# Altium PCB HYDRA_V3_TEMPLATE_MCU_UNDER.PcbDoc
Units mm, origin at the board's own origin, x right, y up, seen from the top; angles counter-clockwise.
Board outline 50 x 45 mm, 4 copper layers (Top Layer, PWR, GND, Bottom Layer), stack 0.603 mm thick; 68 components, 45 nets, 330 pads, 83 vias.
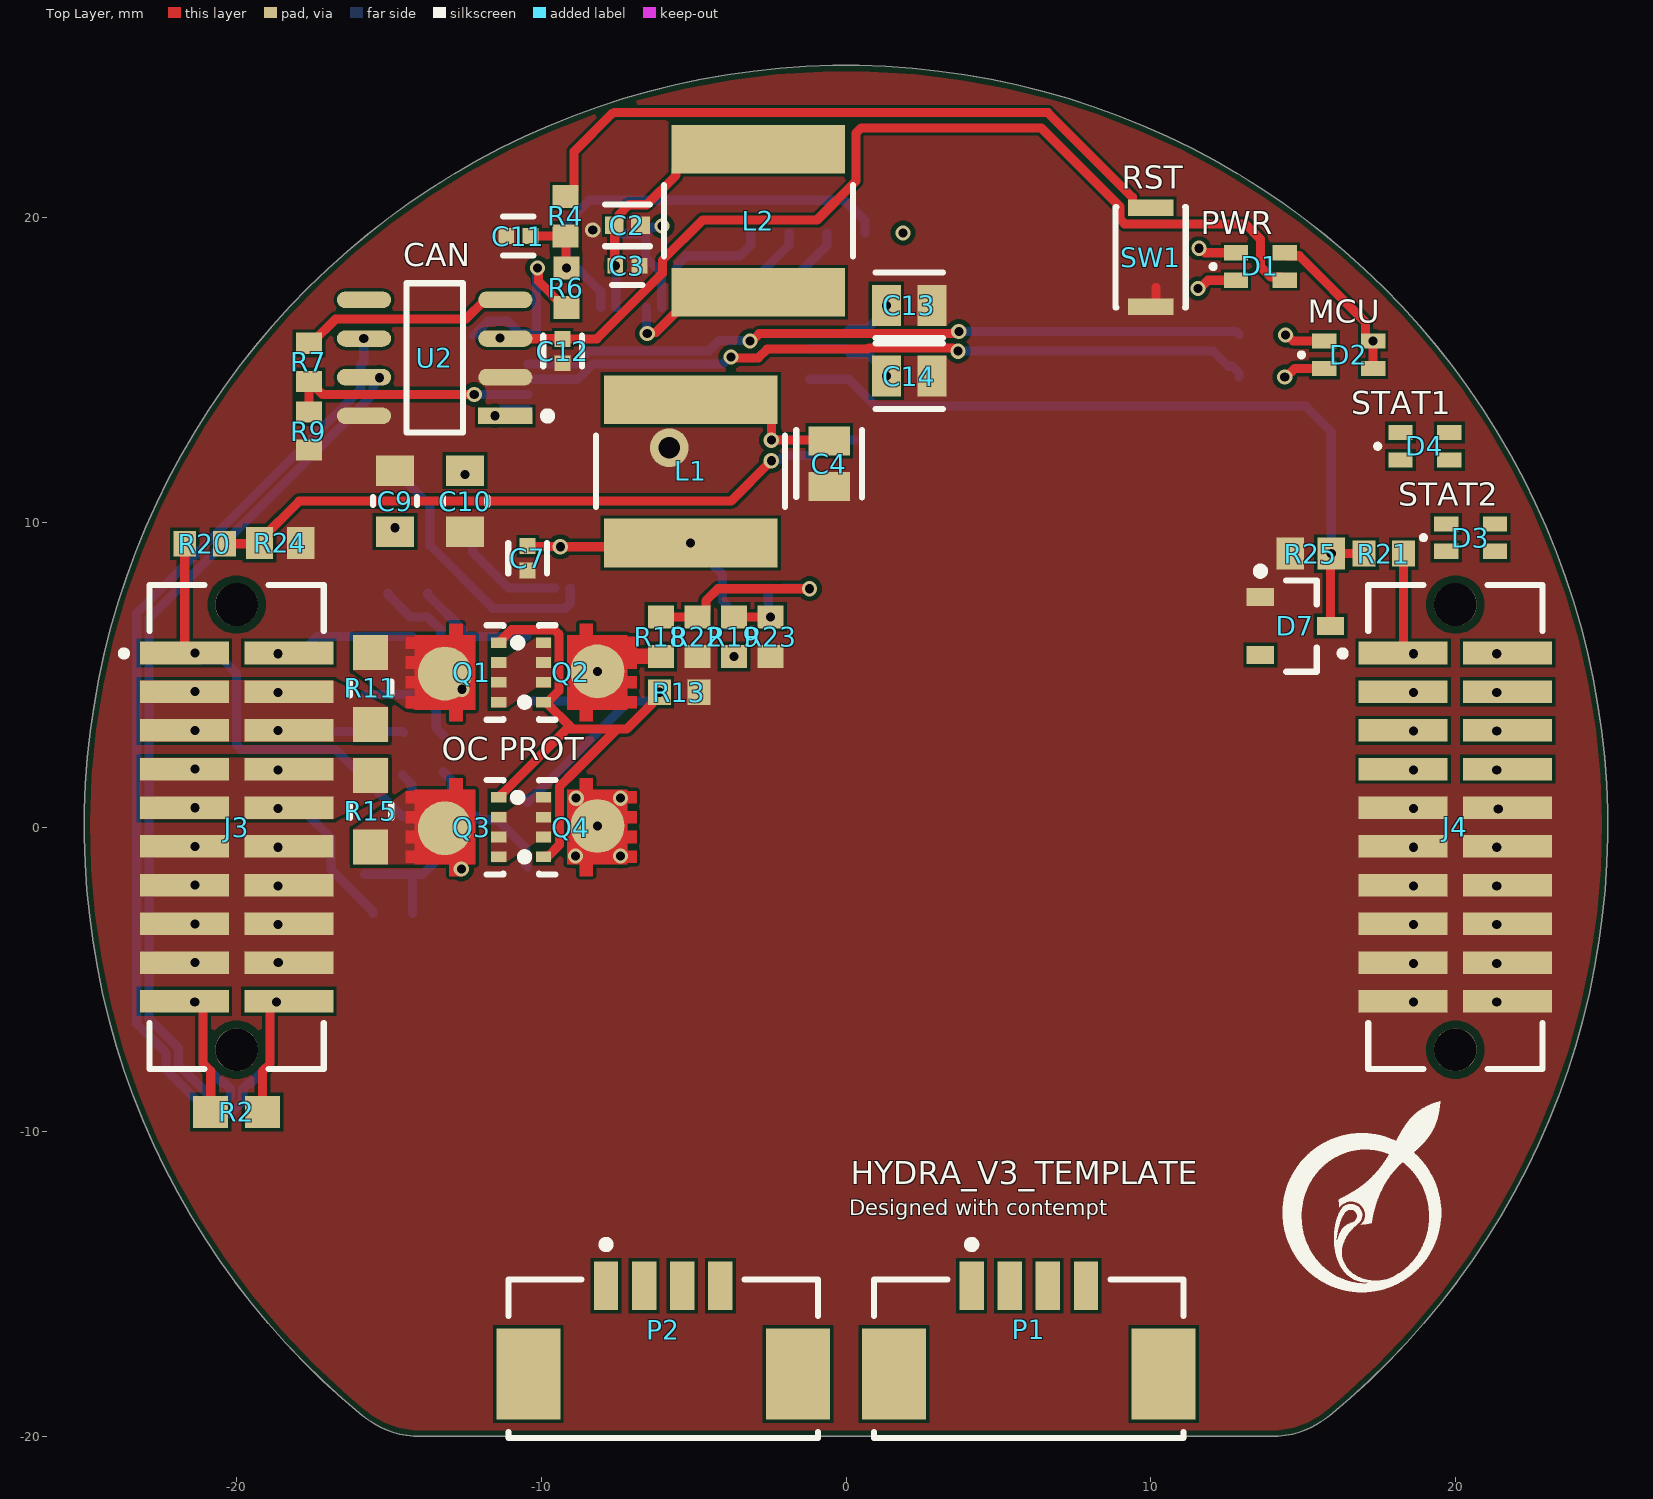
[diagram p0: Top Layer view]
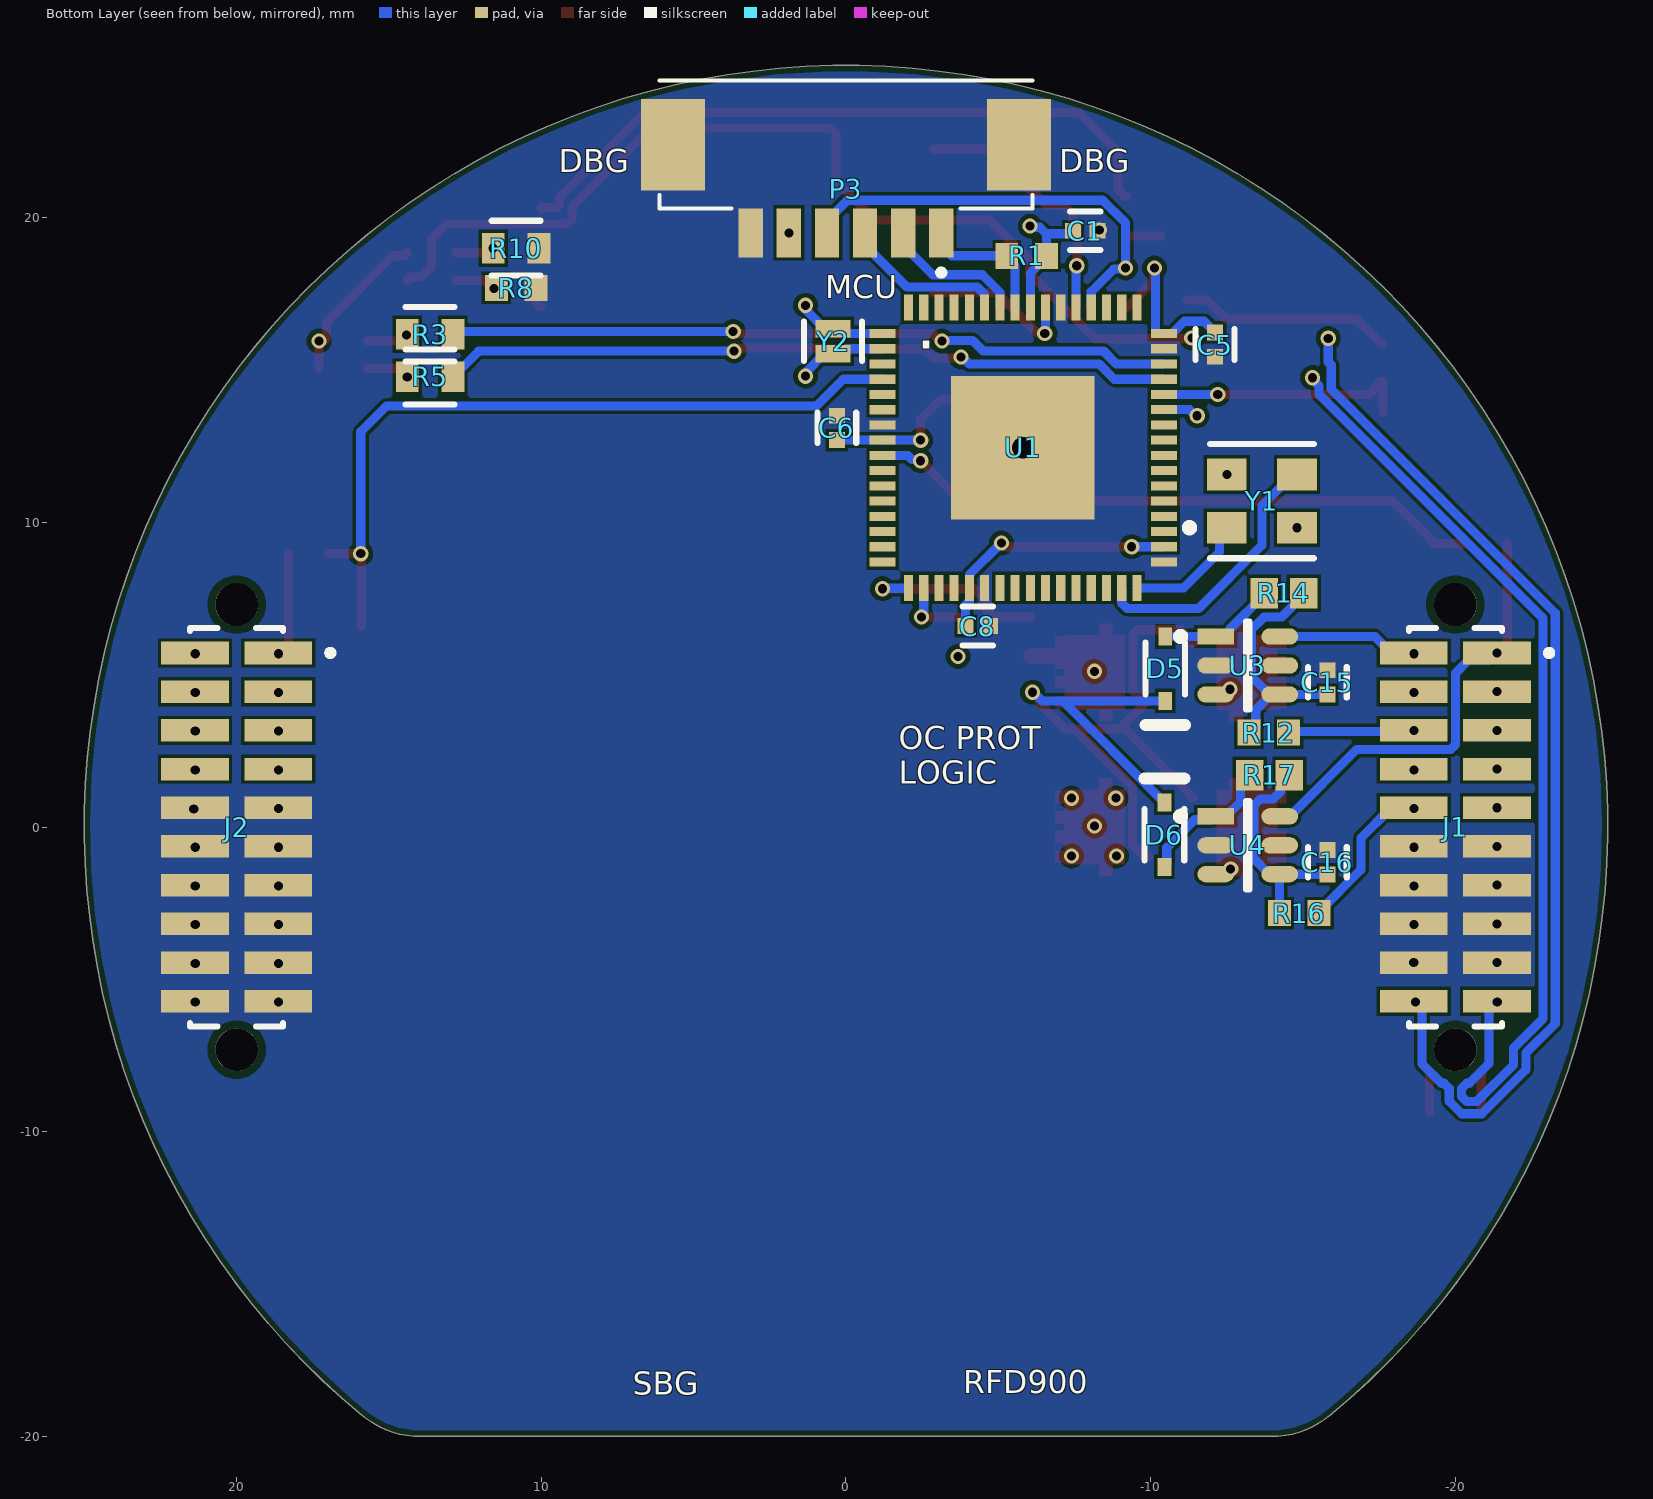
[diagram p1: Bottom Layer view, seen from below]
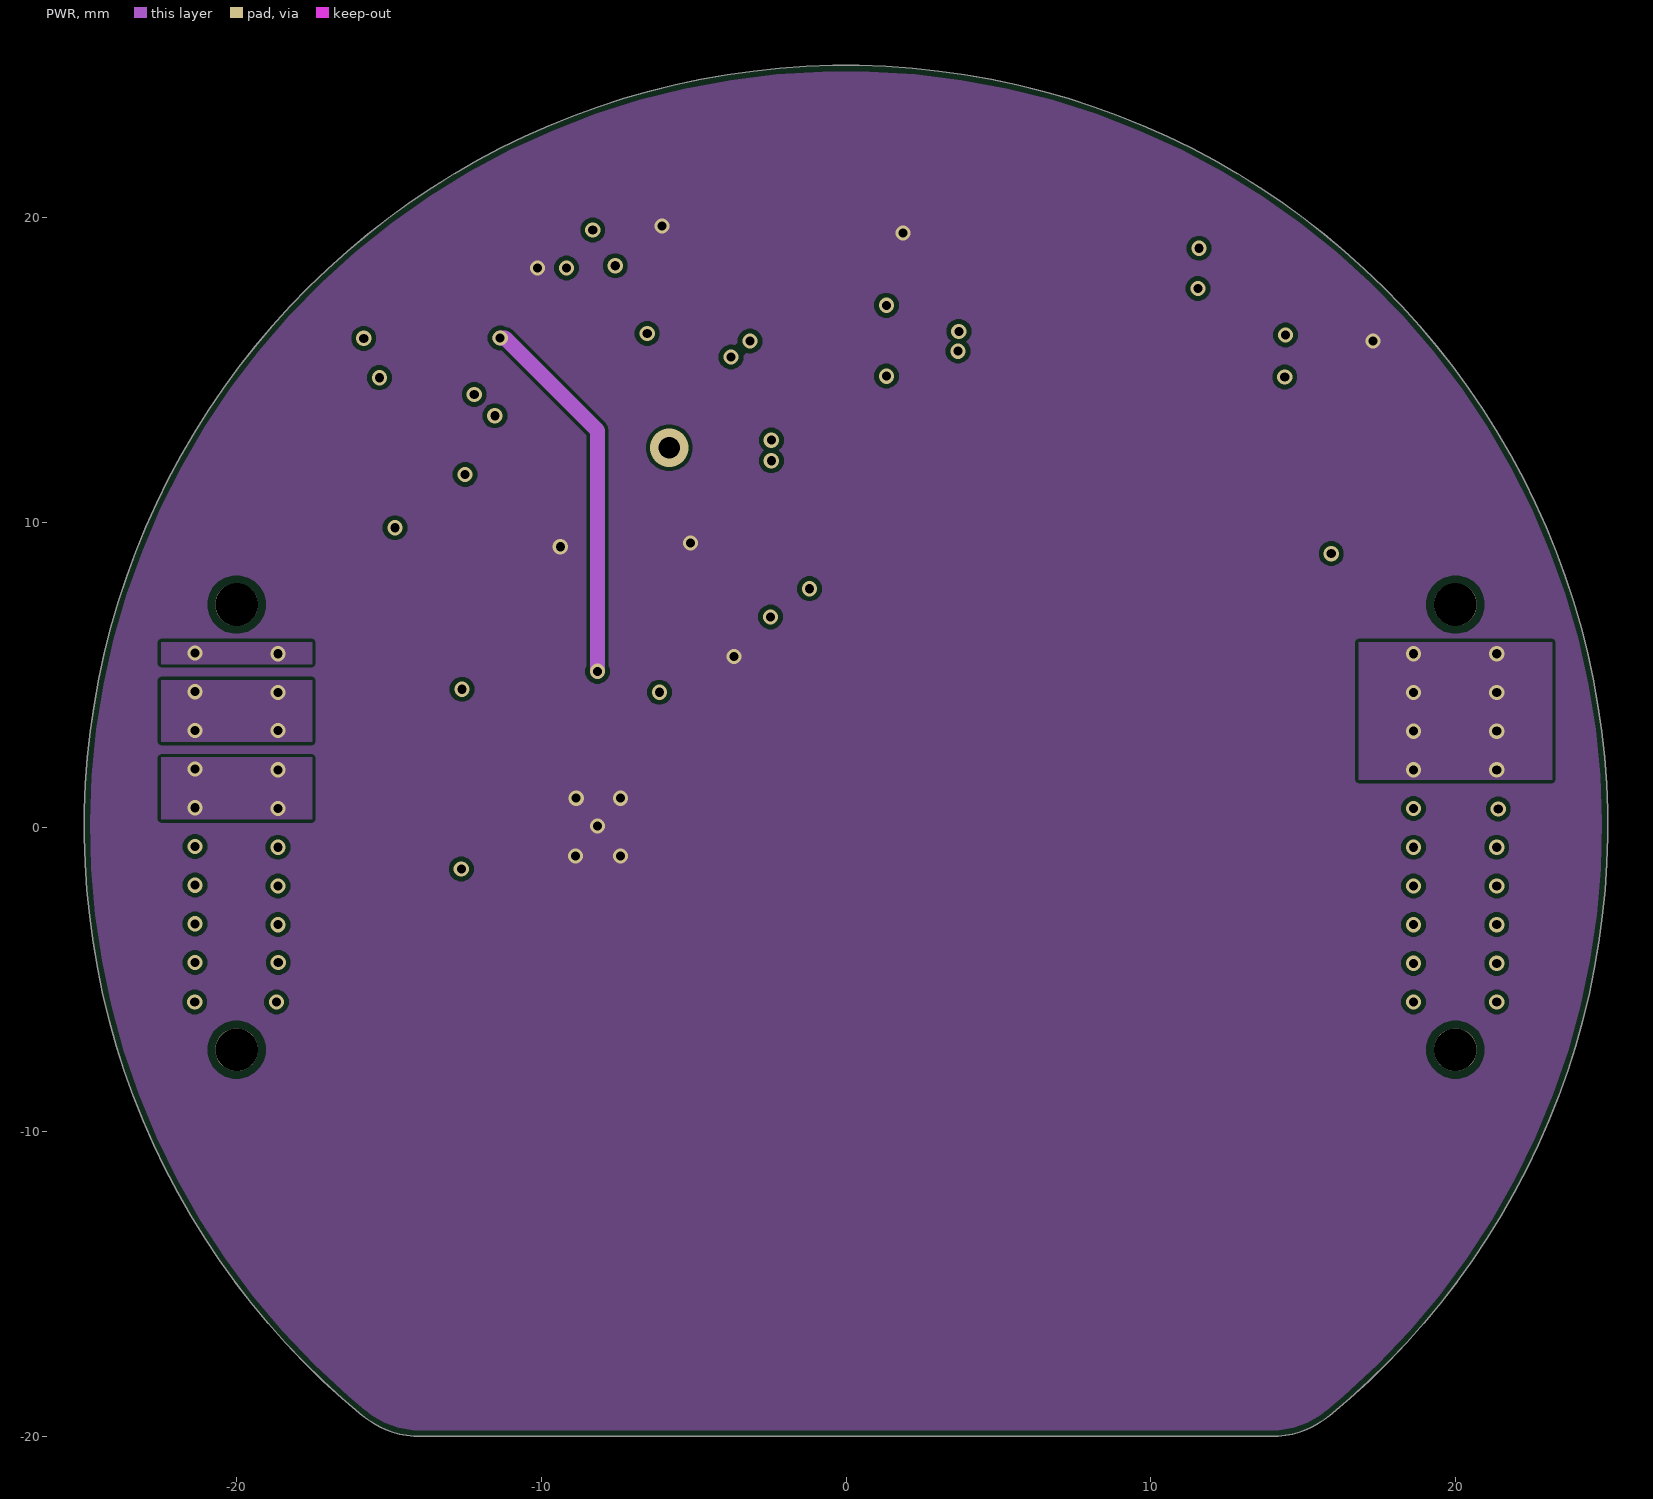
[diagram p2: PWR]
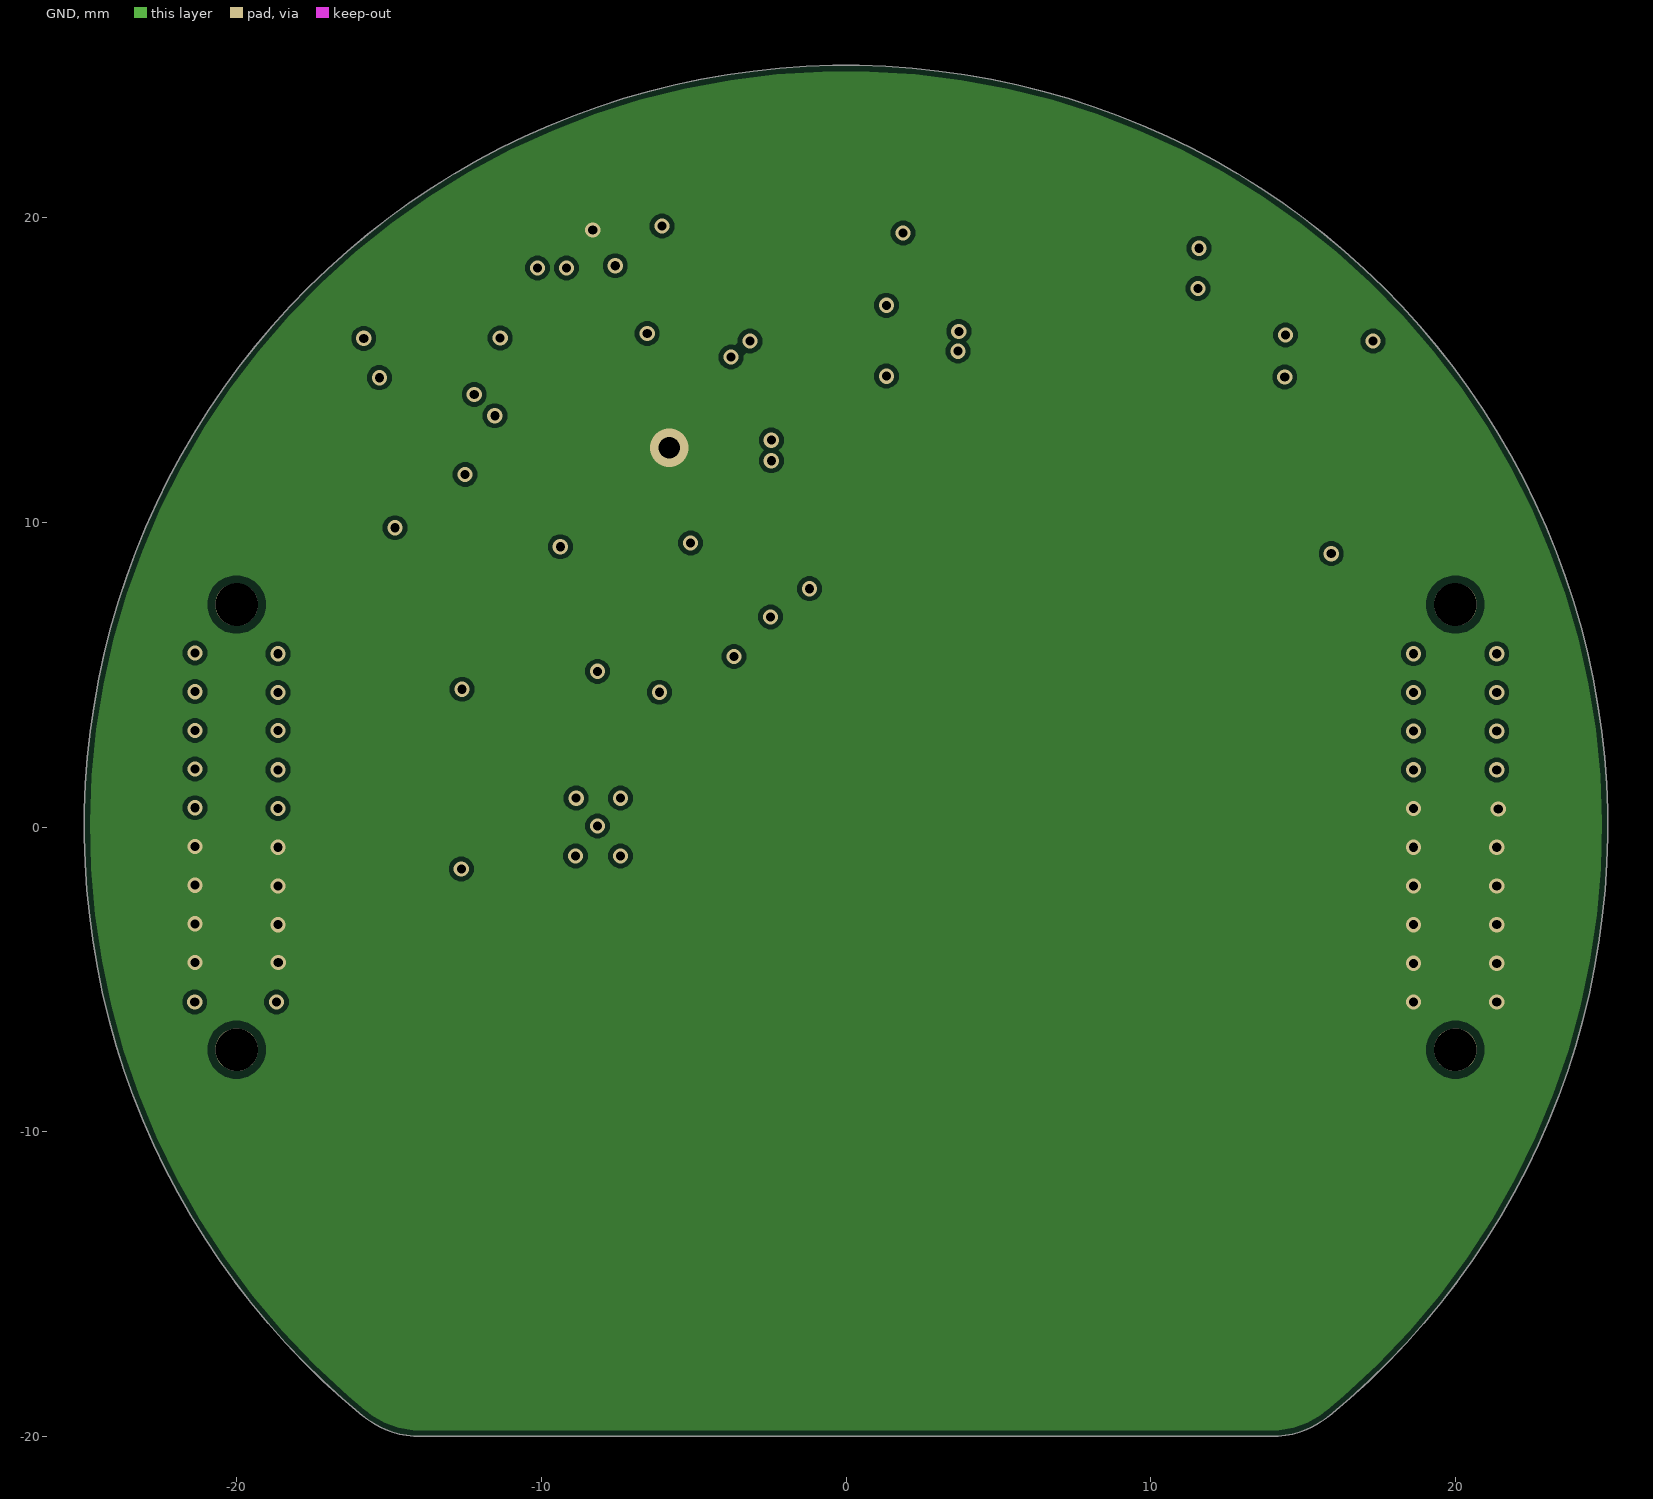
[diagram p3: GND]
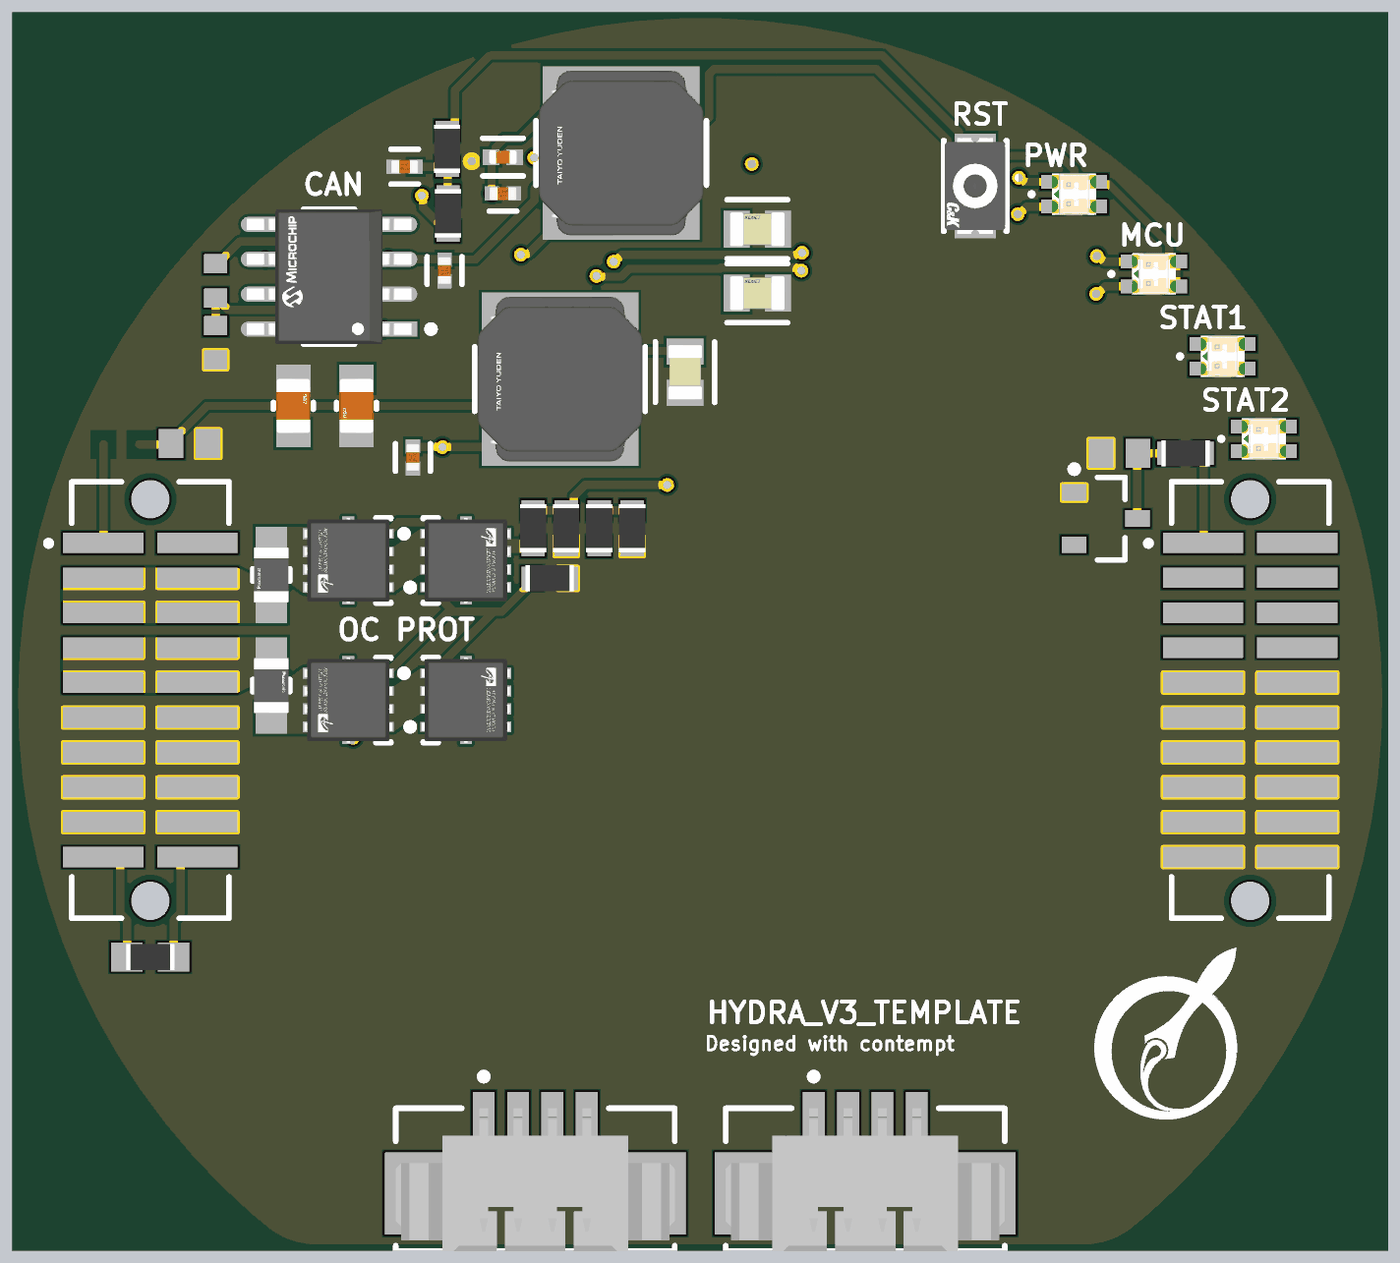
[diagram p4: 3D render of the assembled board from above, using the file's embedded part models]
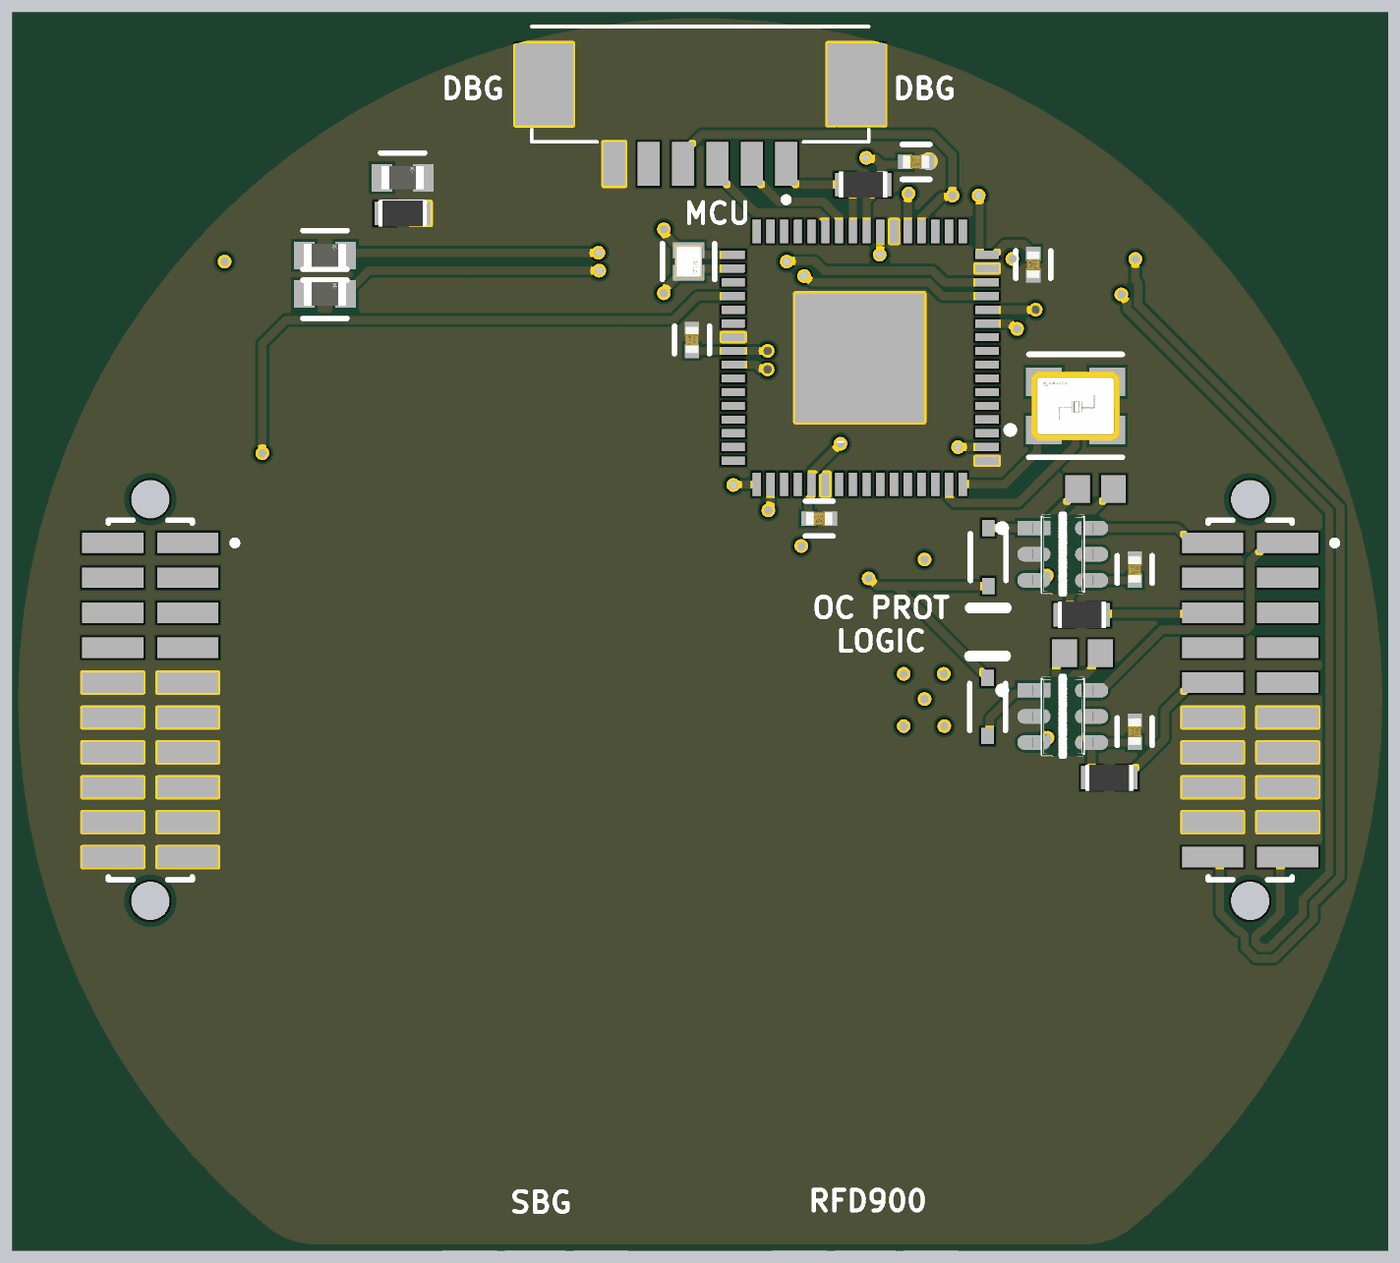
[diagram p5: 3D render of the assembled board from below, using the file's embedded part models]

## Layer stack, top to bottom
Top Solder: solder mask 0.0102, Solder Resist, Dk 3.5
Top Layer: signal copper 0.0356
Dielectric 2: prepreg 0.0711, PP-006, Dk 4.1
PWR: signal copper 0.035
Dielectric 1: dielectric 0.32, FR-4, Dk 4.8
GND: signal copper 0.035
Dielectric 3: prepreg 0.0711, PP-006, Dk 4.1
Bottom Layer: signal copper 0.0356
Bottom Solder: solder mask 0.0102, Solder Resist, Dk 3.5

## Board outline
-15.888,-19.298 ccw(c-13.96,-17) -13.96,-20 13.96,-20 ccw(c13.96,-17) 15.888,-19.298 15.868,-19.318 ccw(c0,0)

## Design rules (kind name [scope] priority, off if disabled: settings)
BoardOutlineClearance [All] p1: gap=0.2 ignorepadtopadclearanceinfootprint=FALSE
Clearance [All] p1: gap=0.102 ignorepadtopadclearanceinfootprint=FALSE except(0.127: Arc-Via Track-Via SMDPad-Via THPad-Via Via-Via Via-Fill Via-Poly Via-Region Via-Text; 0.25: Arc-Hole Track-Hole SMDPad-Hole THPad-Hole Via-Hole Fill-Hole Poly-Hole Region-Hole Text-Hole)
ComponentClearance [All] p1: gap=0.102 collisioncheckmode=3 verticalgap=0.102 showdistances=TRUE
DiffPairsRouting [All] p1: maxlimit=0.102 minlimit=0.102 mostfreqgap=0.102 toplayer_minwidth=0.102 toplayer_maxwidth=1816.048 toplayer_prefwidth=0.102 midlayer1_minwidth=0.102 midlayer1_maxwidth=1816.048 midlayer1_prefwidth=0.102 midlayer2_minwidth=0.102 midlayer2_maxwidth=1816.048 midlayer2_prefwidth=0.102 bottomlayer_minwidth=0.102 bottomlayer_maxwidth=1816.048 bottomlayer_prefwidth=0.102 maxuncoupledlength=12.7
Height [All] p1: minheight=0 maxheight=1816.048 prefheight=12.7
HoleSize [All] p1: absolutevalues=TRUE maxlimit=6.3 minlimit=0.2 maxpercent=80.000 minpercent=20.000
HoleToHoleClearance [All] p1: gap=0.25 allowstackedmicrovias=FALSE
MinimumAnnularRing [All] p1: minimumring=0.076
MinimumSolderMaskSliver [All] p1: minsoldermaskwidth=0
PlaneClearance [All] p1: clearance=0.102
PlaneConnect PlaneConnectPowerPads [InPadClass('PowerPads')] p1: planeconnectstyle=Direct reliefexpansion=0.508 reliefentries=4 reliefconductorwidth=0.254 reliefairgap=0.254
PlaneConnect [All] p2: pad.planeconnectstyle=Relief pad.reliefexpansion=0.3 pad.reliefentries=4 pad.reliefconductorwidth=0.102 pad.reliefairgap=0.102 via.planeconnectstyle=Direct via.reliefexpansion=0.3 via.reliefentries=4 via.reliefconductorwidth=0.127 via.reliefairgap=0.127
PolygonConnect PolygonConnectPowerPads [All vs (InPadClass('PowerPads'))] p1: connectstyle=Direct reliefconductorwidth=0.254 reliefentries=4 polygonreliefangle="90 Angle" airgapwidth=0.254
PolygonConnect [All] p2: thpad.connectstyle=Relief thpad.reliefconductorwidth=0.102 thpad.reliefentries=4 thpad.polygonreliefangle="90 Angle" thpad.airgapwidth=0.102 smdpad.connectstyle=Direct smdpad.reliefconductorwidth=0.102 smdpad.reliefentries=4 smdpad.polygonreliefangle="90 Angle" smdpad.airgapwidth=0.102 via.connectstyle=Direct via.reliefconductorwidth=0.127 via.reliefentries=4 via.polygonreliefangle="90 Angle" via.airgapwidth=0.127
RoutingVias [All] p1: holewidth=0.2 width=0.45 viastyle="Through Hole" minholewidth=0.2 minwidth=0.45 maxholewidth=6.3 maxwidth=6.55
SilkToSilkClearance [All] p1: silktosilkclearance=0
SilkToSolderMaskClearance [IsPad] p1: minsilkscreentomaskgap=0.102 clearancetoexposedcopper=TRUE
SolderMaskExpansion [All] p1: expansion=0.075 istentingtop=FALSE
Width [All] p1: maxlimit=1816.048 minlimit=0.102 preferedwidth=0.102
20 further rules are at their usual default settings.

## Classes and differential pairs
component class OC_PROT: C15 C16 D5 D6 Q1 Q2 Q3 Q4 R11 R12 R13 R14 R15 R16 R17 U3 U4
component class MCU_PINOUT: C1 C2 C3 C4 C5 C6 C7 C8 C9 C10 C11 C12 C13 C14 D1 D2 D7 L1 L2 P3 R1 R2 R3 R4 R5 R6 R7 R8 R9 R10 R18 R19 R20 R21 R22 R23 R24 R25 SW1 U1 U2 Y1 Y2
component class HYDRA_V3_TEMPLATE: D3 D4 J1 J2 J3 J4 P1 P2
differential pair CAN0_R: +CAN0_R_P -CAN0_R_N

## Components (designator, comment, footprint, x,y, rotation, side; value= is the part's Value field where it differs from the comment)
C1 "C0402C104K8PACTU" FP-C0402-BB-MFG -7.85,19.575 r180 bottom value="0.10 μF"
C2 "GRM155R60J475ME47D" FP-GRM155-0_1-IPC_B -7.175,19.75 r180 top
C3 "C0402C104K8PACTU" FP-C0402-BB-MFG -7.175,18.425 r0 top value="0.10 μF"
C4 "C0805C106K8PACTU" FP-C0805C-DG-MFG -0.55,11.925 r270 top value=10uF
C5 "C0402C104K8PACTU" FP-C0402-BB-MFG -12.112,15.838 r270 bottom value="0.10 μF"
C6 "C0402C104K8PACTU" FP-C0402-BB-MFG 0.3,13.1 r90 bottom value="0.10 μF"
C7 "C0402C104K8PACTU" FP-C0402-BB-MFG -10.45,8.825 r270 top value="0.10 μF"
C8 "C0402C104K8PACTU" FP-C0402-BB-MFG -4.325,6.6 r180 bottom value="0.10 μF"
C9 "08051A6R8CAT2A" FP-0805-L_2_01_0_2-W_1_25-MFG -14.8,10.7 r90 top
C10 "08051A6R8CAT2A" FP-0805-L_2_01_0_2-W_1_25-MFG -12.5,10.7 r270 top
C11 "C0402C104K8PACTU" FP-C0402-BB-MFG -10.75,19.4 r180 top value="0.10 μF"
C12 "C0402C104K8PACTU" FP-C0402-BB-MFG -9.3,15.625 r90 top value="0.10 μF"
C13 "C0805C180J5GACTU" FP-C0805C-DN-MFG 2.075,17.125 r0 top value="18 pF"
C14 "C0805C180J5GACTU" FP-C0805C-DN-MFG 2.075,14.8 r0 top value="18 pF"
C15 "C0402C104K8PACTU" FP-C0402-BB-MFG -15.8,4.75 r90 bottom value="0.10 μF"
C16 "C0402C104K8PACTU" FP-C0402-BB-MFG -15.8,-1.15 r90 bottom value="0.10 μF"
D1 "150066RG54050" WL-SBCD_0606 13.6,18.4 r90 top locked
D2 "150066RG54050" WL-SBCD_0606 16.5,15.5 r90 top locked
D3 "150066RG54050" WL-SBCD_0606 20.5,9.5 r90 top locked
D4 "150066RG54050" WL-SBCD_0606 19,12.5 r90 top locked
D5 "1N4148WS-7-F" DIOD-SOD323-2-A_V -10.475,5.199 r270 bottom
D6 "1N4148WS-7-F" DIOD-SOD323-2-A_V -10.45,-0.25 r90 bottom
D7 "BZX84-A3V3,215" SOT95P230X110-3N 14.75,6.6 r0 top
J1 "SFML-110-02-L-D-A" SFML-110-02-L-D-A-Footprint-1 -20,0 r270 bottom locked
J2 "SFML-110-02-L-D-A" SFML-110-02-L-D-A-Footprint-1 20,0 r270 bottom locked
J3 "TFML-110-02-L-D-A" TFML-110-02-L-D-A-Footprint-1 -20,0 r270 top locked
J4 "TFML-110-02-L-D-A" TFML-110-02-L-D-A-Footprint-1 20,0 r270 top locked
L1 "NR6028T100M" FP-NR6028-MFG -5.1,11.675 r90 top
L2 "NR6028T100M" FP-NR6028-MFG -2.875,19.9 r90 top
P1 "53261-0471" MOLEX-53261-0471_V 6,-16.5 r0 top
P2 "53261-0471" MOLEX-53261-0471_V -6,-16.5 r0 top
P3 "0532610671" 0532610671-Footprint-1 0,19.5 r0 bottom
Q1 "SISH615ADN-T1-GE3" SISH615ADN-T1-GE3-Footprint-1 -12.8,5.037 r90 top
Q2 "SISH615ADN-T1-GE3" SISH615ADN-T1-GE3-Footprint-1 -8.525,5.112 r270 top
Q3 "SISH615ADN-T1-GE3" SISH615ADN-T1-GE3-Footprint-1 -12.8,-0.038 r90 top
Q4 "SISH615ADN-T1-GE3" SISH615ADN-T1-GE3-Footprint-1 -8.525,0.038 r270 top
R1 "ERJ3EKF1002V" RESC1609X55X30LL15T15 -5.925,18.75 r180 bottom
R2 "ERJ-3EKF1200V" RESC1609X55X30ML15T15 -20,-9.35 r180 top
R3 "CRCW060351R0FKEA" FP-CRCW0603-e3-MFG 13.65,16.175 r180 bottom
R4 "ERJ-3EKF3300V" RESC1608X55X30LL15T15#1 -9.2,20.05 r90 top
R5 "CRCW060351R0FKEA" FP-CRCW0603-e3-MFG 13.65,14.775 r180 bottom
R6 "ERJ3EKF1002V" RESC1609X55X30LL15T15 -9.175,17.7 r90 top
R7 "ERJ-3EKF1001V" RESC1608X55X30LL15T15#2 -17.625,15.25 r90 top
R8 "ERJ-3EKF3300V" RESC1608X55X30LL15T15#1 10.825,17.7 r180 bottom
R9 "ERJ3EKF1801V" RESC1608X55X30LL15T15#2 -17.625,13 r90 top
R10 "CRCW060351R0FKEA" FP-CRCW0603-e3-MFG 10.825,19 r180 bottom
R11 "ERJ-6DSFR10V" FP-ERJ6D-MFG -15.6,4.55 r90 top
R12 "ERJ3EKF1002V" RESC1609X55X30LL15T15 -13.875,3.1 r180 bottom
R13 "ERJ3EKF1002V" RESC1609X55X30LL15T15 -5.475,4.425 r180 top
R14 "RT0603BRD071ML" RESC1608X55X30NL20T20 -14.375,7.675 r180 bottom
R15 "ERJ-6DSFR10V" FP-ERJ6D-MFG -15.6,0.525 r270 top
R16 "ERJ3EKF1002V" RESC1609X55X30LL15T15 -14.875,-2.825 r180 bottom
R17 "RT0603BRD071ML" RESC1608X55X30NL20T20 -13.9,1.7 r180 bottom
R18 "ERJ3EKF1002V" RESC1609X55X30LL15T15 -6.075,6.25 r270 top
R19 "ERJ3EKF1002V" RESC1609X55X30LL15T15 -3.675,6.25 r270 top
R20 "ERJ3EKF1002V" RESC1609X55X30LL15T15 -21.05,9.3 r180 top
R21 "ERJ3EKF1002V" RESC1609X55X30LL15T15 17.65,8.975 r0 top
R22 "ERJ3EKF1002V" RESC1609X55X30LL15T15 -4.875,6.25 r90 top
R23 "ERJ3EKF1002V" RESC1609X55X30LL15T15 -2.475,6.25 r90 top
R24 "CRCW06032K70JNEA" RESC1609X50X30ML10T20 -18.575,9.325 r180 top
R25 "CRCW06032K70JNEA" RESC1609X50X30ML10T20 15.25,8.975 r0 top
SW1 "KXT331LHS" FP-KXT331LHS-MFG 10,18.7 r270 top locked
U1 "SAM_E51_64VQFN" SAM_E51_64VQFN-Footprint-1 -2.05,7.85 r180 bottom
U2 "MCP2544FD-E/SN" FP-C04-057-SN-IPC_C -13.5,15.4 r180 top
U3 "TLV1805DBVR" FP-DBV0006A-IPC_C -13.184,5.304 r180 bottom
U4 "TLV1805DBVR" FP-DBV0006A-IPC_C -13.184,-0.596 r180 bottom
Y1 "ABM8-48.000MHZ-B2-T" FP-ABM8-MFG -13.65,10.7 r180 bottom
Y2 "ECS-.327-12.5-1210-TR" FP-ECX-1210-MFG 0.425,15.95 r270 bottom

## Footprints (in the part's own frame and the unit in brackets; to place one, negate y for a bottom-side part, rotate by r counter-clockwise, add the part's x,y. Pads: shape width x height; smd on the part's side, far side on the other; paste and mask are expansions set on the pad)
0532610671-Footprint-1 [mm]
  rect 0.8x1.6 smd: 1(-3.125,0) 2(-1.875,0) 3(-0.625,0) 4(0.625,0) 5(1.875,0) 6(3.125,0)
  rect 2.1x3 smd: S1(-5.675,-2.9) S2(5.675,-2.9)
  silkscreen extent -6.12,-5 6.12,1.4
DIOD-SOD323-2-A_V [mm] "SOD-323, 2-Leads, Body 1.7x1.3mm"
  rect 0.59x0.45 smd: 1(-1.055,0) 2(1.055,0)
  silkscreen extent -0.85,-0.65 1.85,0.65, body extent -0.85,-0.65 0.85,0.65, height 1.2
FP-0805-L_2_01_0_2-W_1_25-MFG [mm]
  rect 1x1.25 smd paste+0 mask+0: 1(-1,0) 2(1,0)
  silkscreen extent -0.13,-0.72 0.13,0.72, body extent -1.6,-0.82 1.6,0.82, height 0.25
FP-ABM8-MFG [mm]
  rect 1.3x1.05 smd paste+0 mask+0: 1(-1.15,-0.875) 2(1.15,-0.875) 3(1.15,0.875) 4(-1.15,0.875)
  silkscreen extent -2.5,-1.88 1.7,1.88, body extent -1.6,-1.25 1.6,1.25, height 0.8
FP-C04-057-SN-IPC_C [mm]
  rect 1.777x0.542 smd paste+0 mask+0: 1(-2.318,1.905)
  rrect100% 1.777x0.542 smd paste+0 mask+0: 2(-2.318,0.635) 3(-2.318,-0.635) 4(-2.318,-1.905) 5(2.318,-1.905) 6(2.318,-0.635) 7(2.318,0.635) 8(2.318,1.905)
  silkscreen extent -3.83,-2.45 0.93,2.45, body extent -3.31,-2.55 3.31,2.55, height 0.25
FP-C0402-BB-MFG [mm]
  rect 0.52x0.52 smd paste+0 mask+0: 1(-0.4,0) 2(0.4,0)
  silkscreen extent -0.5,-0.64 0.5,0.64, body extent -0.5,-0.25 0.5,0.25, height 0.55
FP-C0805C-DG-MFG [mm]
  rect 0.95x1.35 smd paste+0 mask+0: 1(-0.75,0) 2(0.75,0)
  silkscreen extent -1.11,-1.08 1.1,1.07, body extent -1.4,-0.85 1.4,0.85, height 0.25
FP-C0805C-DN-MFG [mm]
  rect 0.95x1.35 smd paste+0 mask+0: 1(-0.75,0) 2(0.75,0)
  silkscreen extent -1.1,-1.07 1.1,1.07, body extent -1.4,-0.85 1.4,0.85, height 0.25
FP-CRCW0603-e3-MFG [mm]
  rect 0.75x1 smd paste+0 mask+0: 1(-0.75,0) 2(0.75,0)
  silkscreen extent -0.8,-0.9 0.8,0.9, body extent -0.77,-0.43 0.77,0.43, height 0.5
FP-DBV0006A-IPC_C [mm]
  rect 1.205x0.53 smd paste+0 mask+0: 1(-1.05,0.95)
  rrect100% 1.205x0.53 smd paste+0 mask+0: 2(-1.05,0) 3(-1.05,-0.95) 4(1.05,-0.95) 5(1.05,0) 6(1.05,0.95)
  silkscreen extent -2.33,-1.45 0.05,1.45, body extent -1.4,-1.45 1.4,1.45, height 1.45
FP-ECX-1210-MFG [mm]
  rect 0.575x1.14 smd paste+0 mask+0: 1(-0.413,0) 2(0.413,0)
  silkscreen extent -0.65,-0.95 0.65,0.95, body extent -0.6,-0.5 0.6,0.5, height 0.5
FP-ERJ6D-MFG [mm]
  rect 1.15x1.15 smd paste+0 mask+0: 1(-1.175,0) 2(1.175,0)
  silkscreen extent -0.23,-0.67 0.23,0.67, body extent -1.85,-0.77 1.85,0.77, height 0.25
FP-GRM155-0_1-IPC_B [mm]
  rect 0.615x0.572 smd paste+0 mask+0: 1(-0.429,0) 2(0.429,0)
  silkscreen extent -0.74,-0.69 0.74,0.69, body extent -0.89,-0.44 0.89,0.44, height 0.25
FP-KXT331LHS-MFG [mm]
  rect 0.55x1.5 smd paste+0 mask+0: 1(-1.625,0) 2(1.625,0)
  silkscreen extent -1.65,-1.15 1.65,1.15, body extent -2,-1.25 2,1.25, height 0.25
FP-NR6028-MFG [mm]
  rect 1.6x5.7 smd paste+0 mask+0: 1(-2.35,0) 2(2.35,0)
  silkscreen extent -1.17,-3.1 1.17,3.1, body extent -3.25,-3.2 3.25,3.2, height 0.25
MOLEX-53261-0471_V [mm] "SMD, 4-Leads, Body 10.15x5.2mm, Pitch 1.25mm"
  rect 0.8x1.6 smd: 1(-1.875,1.45) 2(-0.625,1.45) 3(0.625,1.45) 4(1.875,1.45)
  rect 2.1x3 smd: MP1(-4.425,-1.45) MP2(4.425,-1.45)
  silkscreen extent -5.08,-3.55 5.08,2.93, body extent -5.08,-3.55 5.07,1.65, height 3.4
RESC1608X55X30LL15T15#1 [mm] "Chip Resistor, 2-Leads, Body 1.75x0.95mm, IPC High Density"
  rect 0.75x0.85 smd: 1(-0.65,0) 2(0.65,0)
  body extent -0.87,-0.48 0.87,0.48, height 0.55
RESC1608X55X30LL15T15#2 [mm] "Chip Resistor, 2-Leads, Body 1.60x0.80mm, IPC High Density"
  rect 0.7x0.85 smd: 1(-0.625,0) 2(0.625,0)
  body extent -0.87,-0.48 0.87,0.48, height 0.55
RESC1608X55X30NL20T20 [mm] "Chip Resistor, 2-Leads, Body 1.60x0.80mm, IPC Medium Density"
  rect 0.9x1 smd: 1(-0.65,0) 2(0.65,0)
  body extent -0.9,-0.5 0.9,0.5, height 0.55
RESC1609X50X30ML10T20 [mm] "Chip Resistor, 2-Leads, Body 1.55x0.85mm, IPC Low Density"
  rect 0.9x1.05 smd: 1(-0.675,0) 2(0.675,0)
  body extent -0.82,-0.48 0.82,0.48, height 0.5
RESC1609X55X30LL15T15 [mm] "Chip Resistor, 2-Leads, Body 1.75x0.95mm, IPC High Density"
  rect 0.75x0.85 smd: 1(-0.65,0) 2(0.65,0)
  body extent -0.87,-0.48 0.87,0.48, height 0.55
RESC1609X55X30ML15T15 [mm] "Chip Resistor, 2-Leads, Body 1.75x0.95mm, IPC Low Density"
  rect 1.15x1.05 smd: 1(-0.85,0) 2(0.85,0)
  body extent -0.87,-0.48 0.87,0.48, height 0.55
SAM_E51_64VQFN-Footprint-1 [mm]
  rect 0.85x0.3 smd: 1(-0.85,8.35) 2(-0.85,7.85) 3(-0.85,7.35) 4(-0.85,6.85) 5(-0.85,6.35) 6(-0.85,5.85) 7(-0.85,5.35) 8(-0.85,4.85) 9(-0.85,4.35) 10(-0.85,3.85) 11(-0.85,3.35) 12(-0.85,2.85) 13(-0.85,2.35) 14(-0.85,1.85) 15(-0.85,1.35) 16(-0.85,0.85) 33(8.382,0.85) 34(8.382,1.35) 35(8.382,1.85) 36(8.382,2.35) 37(8.382,2.85) 38(8.382,3.35) 39(8.382,3.85) 40(8.382,4.35) 41(8.382,4.85) 42(8.382,5.35) 43(8.382,5.85) 44(8.382,6.35) 45(8.382,6.85) 46(8.382,7.35) 47(8.382,7.85) 48(8.382,8.35)
  rect 0.3x0.85 smd: 17(0,0) 18(0.5,0) 19(1,0) 20(1.5,0) 21(2,0) 22(2.5,0) 23(3,0) 24(3.5,0) 25(4,0) 26(4.5,0) 27(5,0) 28(5.5,0) 29(6,0) 30(6.5,0) 31(7,0) 32(7.5,0) 49(7.5,9.2) 50(7,9.2) 51(6.5,9.2) 52(6,9.2) 53(5.5,9.2) 54(5,9.2) 55(4.5,9.2) 56(4,9.2) 57(3.5,9.2) 58(3,9.2) 59(2.5,9.2) 60(2,9.2) 61(1.5,9.2) 62(1,9.2) 63(0.5,9.2) 64(0,9.2)
  rect 4.7x4.7 smd: 65(3.75,4.6)
SFML-110-02-L-D-A-Footprint-1 [mm]
  rect 0.74x2.22 smd: 01(-5.715,1.365) 02(-5.715,-1.365) 03(-4.445,1.365) 04(-4.445,-1.365) 05(-3.175,1.365) 06(-3.175,-1.365) 07(-1.905,1.365) 08(-1.905,-1.365) 09(-0.635,1.365) 10(-0.635,-1.365) 11(0.635,1.365) 12(0.635,-1.365) 13(1.905,1.365) 14(1.905,-1.365) 15(3.175,1.365) 16(3.175,-1.365) 17(4.445,1.365) 18(4.445,-1.365) 19(5.715,1.365) 20(5.715,-1.365)
  round 1.4 hole 1.4 unplated: ""(-7.305,0) ""(7.305,0)
  silkscreen extent -6.54,-1.53 6.54,3.17
SISH615ADN-T1-GE3-Footprint-1 [mm]
  rect 0.35x0.5 smd paste+0 mask+0: 1(-0.937,-1.4) 2(-0.288,-1.4) 3(0.363,-1.4) 4(1.012,-1.4)
  round 1.769 smd paste+0 mask+0: 5-6-7-8(0,0.367)
  Top Layer region: -1.187,-0.63 -1.187,-0.215 -1.568,-0.215 -1.568,0.215 -1.187,0.215 -1.187,1.35 -1.137,1.35 -1.137,1.65 -0.737,1.65 -0.737,1.35 -0.487,1.35 -0.487,1.65 -0.088,1.65 -0.088,1.35 0.163,1.35 0.163,1.65 0.563,1.65 0.563,1.35 0.813,1.35 0.813,1.65 1.212,1.65 1.212,1.35 1.262,1.35 1.262,0.215 1.643,0.215 1.643,-0.215 1.262,-0.215 1.262,-0.63
  silkscreen extent -1.51,-2.38 1.59,-1.01, body extent -1.67,-1.75 1.74,1.75, height 0.25
SOT95P230X110-3N [mm] "SOT23, 3-Leads, Body 2.90x2.30mm, Pitch 0.95mm, IPC Medium Density"
  rect 0.9x0.6 smd: 1(-1.15,0.95) 2(-1.15,-0.95) 3(1.15,0)
  silkscreen extent -1.27,-1.5 0.7,1.92, body extent -0.7,-1.5 0.7,1.5, height 1.1
TFML-110-02-L-D-A-Footprint-1 [mm]
  rect 0.74x2.92 smd: 01(-5.715,-1.715) 02(-5.715,1.715) 03(-4.445,-1.715) 04(-4.445,1.715) 05(-3.175,-1.715) 06(-3.175,1.715) 07(-1.905,-1.715) 08(-1.905,1.715) 09(-0.635,-1.715) 10(-0.635,1.715) 11(0.635,-1.715) 12(0.635,1.715) 13(1.905,-1.715) 14(1.905,1.715) 15(3.175,-1.715) 16(3.175,1.715) 17(4.445,-1.715) 18(4.445,1.715) 19(5.715,-1.715) 20(5.715,1.715)
  round 1.4 hole 1.4 unplated: ""(-7.305,0) ""(7.305,0)
  silkscreen extent -7.94,-3.8 7.94,2.86
WL-SBCD_0606 [mm] "SMT Bi-color Chip LED Diffuesed, body 1.5x1.6mm"
  rect 0.5x0.8 smd: 1(-0.45,0.8) 2(-0.45,-0.8) 3(0.45,-0.8) 4(0.45,0.8)
  silkscreen extent -0.07,1.47 0.07,1.62, body extent -0.75,-0.8 0.75,0.8, height 0.55

## Part data
C1 C3 C5 C6 C7 C8 C11 C12 C15 C16: library part CMP-2008-02046-2, "CAP CER 0.1UF 10V X5R 0402", Capacitance="0.10 μF", Manufacturer=Kemet, Package=C0402-BB, Temperature="-55°C to +125°C", Temperature Characteristic=X5R, Temperature Coefficient=15%, Temperature Range High=+125°C, Temperature Range Low=-55°C, Tolerance=0.1, Voltage Rating="10 V", Automotive=No, Category=Cap, ComponentLink2Description=Datasheet, ComponentLink2URL=https://content.kemet.com/datasheets/KEM_C1002_X7R_SMD.pdf, Device Class L1="Passive Components", Device Class L2=Capacitors, Device Class L3="Ceramic Capacitors", Digikey Description="CAP CER 0.1UF 10V X5R 0402", Height=0.55mm, Ipc Land Pattern Name=CAPC10050X50, Lead Free=Yes, Manufacturer Part Number=C0402C104K8PACTU, Material=Ceramic, Mouser Description="Capacitor 100 nF 10 VDC 0402", Octopart=https://octopart.com/c0402c104k8pactu-kemet-140039, RoHS=TRUE
C2: library part CMP-2008-04549-2, "Chip Multilayer Ceramic Capacitors for General Purpose, 0402, 4.7uF, X5R, 15%, 20%, 6.3V", Capacitance=4.7uF, Case Code (Imperial)=0402, Case Code (Metric)=1005, Dielectric=X5R, Max Operating Temperature=85°C, Min Operating Temperature=-55°C, Package Quantity=10000, Tolerance=20%, Voltage=6.3V, Case/Package=0402, Contact Plating=Tin, Depth=0.5mm, Height=0.5mm, Lead Free="Lead Free", Length=1mm, Mount="Surface Mount", Packaging="Tape and Reel", REACH SVHC="No SVHC", Termination=SMD/SMT, Thickness=0.022inch, Voltage Rating=6.3V, Voltage Rating (DC)=6.3V, Weight=0.000212oz, Width=0.02inch
C4: library part CMP-2007-03243-2, "CAP CER 10UF 10V X5R 0805", 3DS Part Number=220-00001, Capacitance=10uF, Manufacturer=Kemet, Package=C0805C-DG, Temperature="-55°C to +85°C", Temperature Characteristic=X5R, Temperature Coefficient=15%, Temperature Range High=+85°C, Temperature Range Low=-55°C, Tolerance=10%, Voltage=10V, Automotive=No, Category=Cap, ComponentLink2Description=Datasheet, ComponentLink2URL=https://content.kemet.com/datasheets/KEM_C1006_X5R_SMD.pdf, Device Class L1="Passive Components", Device Class L2=Capacitors, Device Class L3="Ceramic Capacitors", Digikey Description="CAP CER 10UF 10V X5R 0805", Height=1.4mm, Ipc Land Pattern Name=CAPC200125X125, Lead Free=Yes, Manufacturer Part Number=C0805C106K8PACTU, Material=Ceramic, Mouser Description="CAP CER 10UF 10V X5R 0805", Octopart=https://octopart.com/c0805c106k8pactu-kemet-98697, RoHS=TRUE, Voltage Rating=10V
C9 C10: library part CMP-1036-00709-3, "General Purpose Ceramic Capacitor, 0805, 6.8pF, 0.25pF, C0G, 30ppm/°C, 100V", Capacitance=6.8pF, Case Code (Imperial)=0805, Case Code (Metric)=2012, Dielectric=C0G, Dielectric Material=Ceramic, Insulation Resistance=100GR, Max Operating Temperature=125°C, Min Operating Temperature=-55°C, Package Quantity=1, Temperature Coefficient=0ppm/°C, Tolerance=5%, Voltage=100V, Case/Package=0805, Construction=Flat, Contact Plating=Tin, Depth=1.25mm, Dissipation Factor=10%, Height=0.71mm, Lead Free="Lead Free", Length=2.01mm, Mount="Surface Mount", Number of Pins=2, Packaging="Tape and Reel", Radiation Hardening=No, REACH SVHC="No SVHC", RoHS Compliant=Yes, Series=-, Termination=SMD/SMT, Thickness=0.037inch, Voltage Rating=100V, Voltage Rating (DC)=100V, Width=0.049inch
C13 C14: library part CMP-2007-00302-2, "CAP CER 18PF 50V C0G/NP0 0805", Capacitance="18 pF", Manufacturer=KEMET, Package=C0805C-DN, Temperature="-55°C to +125°C", Temperature Characteristic=C0G, Temperature Coefficient=30ppm/°C, Temperature Range High=+125°C, Temperature Range Low=-55°C, Tolerance=0.05, Voltage Rating="50 V", Automotive=No, Category=Cap, ComponentLink2Description=Datasheet, ComponentLink2URL=https://content.kemet.com/datasheets/KEM_C1003_C0G_SMD.pdf, Device Class L1="Passive Components", Device Class L2=Capacitors, Device Class L3="Ceramic Capacitors", Digikey Description="CAP CER 18PF 50V C0G/NP0 0805", Height=0.88mm, Ipc Land Pattern Name=CAPC200125X78, Lead Free=Yes, Manufacturer Part Number=C0805C180J5GACTU, Material=Ceramic, Mouser Description="Cap Ceramic 18pF 50V C0G 5% SMD 0805 125C Paper T/R", Octopart=https://octopart.com/c0805c180j5gactu-kemet-144810, RoHS=TRUE
D1 D2 D3 D4: library part CMP-004-00034-2, "Led, Red/Grn, 180Mcd/230Mcd, 624Nm/525Nm Rohs Compliant: Yes"
D5 D6: library part CMP-1667-00004-1, "Fast Switching Diode, 75 V, 0.3 A, -65 to 150 degC, 2-Pin SOD323, RoHS, Tape and Reel", ComponentLink1Description="Manufacturer URL", ComponentLink1URL=http://www.diodes.com/, ComponentLink2Description=Datasheet, ComponentLink2URL=http://www.diodes.com/datasheets/ds30097.pdf, DatasheetVersion="Rev. 25-2, 03/2016", PackageDescription="2-Pin Small Outline Diode, Body 1.7 x 1.3 mm", PackageReference=SOD323-2
D7: library part CMP-004-00035-1, "DIODE ZENER 3.3V 250MW SOT23"
J1 J2: library part CMP-002-00076-2, "Headers & Wire Housings .050 Tiger Eye High-Reliability Locking Socket Strip"
J3 J4: library part CMP-002-00077-1, "Conn Shrouded Header (4 Sides) HDR 20 POS 1.27mm Solder ST Top Entry SMD TIGER EYE™ Tube"
L1 L2: library part CMP-14484-000406-1, "SMD Power Inductors 10uH ±20% 1.9A 84.5mΩ", Case/Package=2424, Current Rating=1.9A, DC Resistance (DCR)=84.5mR, Inductance=10uH, Inductance Tolerance=20%, Max Operating Temperature=120°C, Min Operating Temperature=-25°C, Package Quantity=2000, Resistor Type=Wirewound, Self Resonant Frequency=20MHz, Test Frequency=100kHz, Core Material=Ferrite, Halogen Free="Halogen Free", Height=2.8mm, Height - Seated (Max)=0.11inch, Lead Free="Lead Free", Length=0.236inch, Max DC Current=1.9A, Mount="Surface Mount", Number of Pins=2, Packaging="Tape and Reel", RMS Current (Irms)=1.9A, RoHS Compliant=Yes, Saturation Current=1.9A, Series=NR, Shielding=Shielded, Termination=SMD/SMT, Tolerance=20%, Width=6mm
P1 P2: library part CMP-2000-05238-1, "Male Header, Pitch 1.25 mm, 1 x 4 Position, Height 3.4 mm, -40 to 85 degC, RoHS, Tape and Reel", Current Rating=1A, Manufacturer=Molex, Package Description="1.25mm Pitch PicoBlade(TM) Header, Surface Mount, Right Angle, Lead-Free, 4 Circuits", Voltage Rating=125V, Brand=Molex, Contact Material=PhosphorBronze, Contact Plating=Tin, Datasheet URL=http://www.molex.com/pdm_docs/sd/532610471_sd.pdf, Datasheet Version="Rev. G, 01/2012", Factory Pack Quantity=1000, Housing Material=Thermoplastic, Manufacturer URL=http://www.molex.com/, Mounting Angle=Right, Mounting Style=SMD/SMT, Number of Positions=4, Number of Positions / Contacts=4, Number Of Rows=1, Packaging=Reel, Pitch=1.25mm, Product Category=Headers&WireHousings, Product Type=Headers, RoHS=Details, Series=53261, Termination Style=SMD, Tradename=PicoBlade, Type=Shrouded
P3: library part CMP-002-00079-1, "Conn Shrouded Header (4 Sides) HDR 6 POS 1.25mm Solder RA Side Entry SMD PicoBlade™ T/R"
Q1 Q2 Q3 Q4: library part CMP-013-00036-1, "Trans MOSFET P-CH 20V 22.1A 8-Pin PowerPAK 1212 EP T/R"
R1 R6 R12 R13 R16 R18 R19 R20 R21 R22 R23: library part CMP-1012-00623-3, "Chip Resistor, 10 KOhm, +/- 1%, 0.1 W, -55 to 155 degC, 0603 (1608 Metric), RoHS, Tape and Reel", Case Code (Imperial)=0603, Case Code (Metric)=1608, Manufacturer=Panasonic, Max Operating Temperature=155degC, Max Power Dissipation=100mW, Min Operating Temperature=-55degC, Package Description="2-Pin Surface Mount Device, Body 1.6 x 0.85 mm", Package Quantity=1, Package Reference=603, Resistance=10KOhm, Temperature Coefficient=100ppm\/degreesC, Tolerance=1%, Voltage Rating=75V, Case\/Package=0603, Composition=ThickFilm, Contact Plating=Tin, Datasheet URL=https://industrial.panasonic.com/cdbs/www-data/pdf/RDA0000/AOA0000C304.pdf, Datasheet Version=02/2017, Depth=0.8mm, Height=0.45mm, Lead Free=LeadFree, Length=1.6mm, Manufacturer URL=http://www.panasonic.com/, Military Standard=Not, Mount=SurfaceMount, Mounting Technology=SurfaceMount, Number of Pins=2, Number of Terminations=2, Packaging=TapeandReel, Power Rating=100mW, Radiation Hardening=No, REACH SVHC=NoSVHC, RoHSCompliant=true, Termination=SMD/SMT, Voltage Rating (DC)=75V, Width=0.031inch
R2: library part CMP-2000-00213-2, "Chip Resistor, 120 Ohm, +/- 1%, 0.1 W, -55 to 155 degC, 0603 (1608 Metric), RoHS, Tape and Reel", Case Code (Imperial)=0603, Case Code (Metric)=1608, Manufacturer=Panasonic, Max Operating Temperature=155degC, Max Power Dissipation=100mW, Min Operating Temperature=-55degC, Package Description="2-Pin Surface Mount Device, Body 1.6 x 0.85 mm", Package Quantity=1, Resistance=120Ohm, Temperature Coefficient=100ppm/degreesC, Tolerance=1%, Voltage Rating=75V, Case/Package=0603, Composition=ThickFilm, Contact Plating=Tin, Datasheet URL=https://industrial.panasonic.com/cdbs/www-data/pdf/RDA0000/AOA0000C283.pdf, Datasheet Version=42095.0, Depth=0.8mm, Height=0.022inch, Lead Free=LeadFree, Length=1.6mm, Manufacturer URL=http://www.panasonic.com/, Military Standard=Not, Mount=SurfaceMount, Number of Pins=2, Number of Terminations=2, Package Reference=0603, Package URL=http://www.st.com/st-web-ui/static/active/en/resource/technical/document/datasheet/CD00001320.pdf, Packaging=TapeandReel, Power Rating=100mW, Radiation Hardening=No, REACH SVHC=NoSVHC, RoHSCompliant=true, Termination=SMD/SMT, Voltage Rating (DC)=75V, Width=0.031inch
R3 R5 R10: library part CMP-2000-03446-2, "RES Thick Film, 51Ω, 1%, 0.1W, 100ppm/°C, 0603", Case Code (Imperial)=0603, Case Code (Metric)=1608, Max Operating Temperature=155°C, Max Power Dissipation=100mW, Min Operating Temperature=-55°C, Package Quantity=10, Resistance=51R, Temperature Coefficient=100ppm/°C, Tolerance=1%, Voltage Rating=75V, Case/Package=0603, Composition="Thick Film", Contact Plating=Tin, Depth=0.85mm, Features="Automotive AEC-Q200", Height=0.45mm, Lead Free="Lead Free", Length=1.55mm, Military Standard=Not, Number of Pins=2, Number of Terminations=2, Packaging="Tape and Reel", Power Rating=100mW, Radiation Hardening=No, Termination=SMD/SMT, Voltage Rating (DC)=75V, Weight=7.1E-05oz, Width=0.85mm, Working Voltage=75V
R4 R8: library part CMP-2000-00435-2, "Chip Resistor, 330 Ohm, +/- 1%, 0.1 W, -55 to 155 degC, 0603 (1608 Metric), RoHS, Tape and Reel", Current Rating="500 mA", Max Operating Temperature="85 degC", Min Operating Temperature="-25 degC", Package Quantity=1500, Voltage Rating="10 V", ComponentLink1Description="Manufacturer URL", ComponentLink1URL=http://www.panasonic.com/, ComponentLink2Description=Datasheet, ComponentLink2URL=http://industrial.panasonic.com/cdbs/www-data/pdf/RDA0000/AOA0000C86.pdf, Contact Finish=Gold, Contact Material=Copper, Contact Plating=Gold, DatasheetVersion=Apr-15, Gender=Male, Height="1.45 mm", Lead Pitch="1.1 mm", Length="13.7 mm", Mating Cycles=10000, Mount="Surface Mount", PackageDescription="2-Pin Surface Mount Device, Body 1.6 x 0.85 mm", PackageReference=0603, Packaging="Tape and Reel", Pins=8, REACH SVHC="No SVHC", RoHSCompliant=true, Width="1.45 mm"
R7: library part CMP-2000-00180-1, Manufacturer=Panasonic, Part Number=ERJ-3EKF1001V
R9: library part CMP-2000-00294-1, Manufacturer=Panasonic, Part Number=ERJ3EKF1801V
R11 R15: library part CMP-05422-000098-1, "RES 0.1 OHM 1% 1/2W 0805", Case Code (Imperial)=0805, Case Code (Metric)=2012, Max Operating Temperature=155°C, Max Power Dissipation=500mW, Min Operating Temperature=-55°C, Resistance=100mR, Resistor Type="Thick Film", Temperature Coefficient=150ppm/°C, Tolerance=1%, Case/Package=0805, Features="Automotive AEC-Q200", Height=0.028inch, Length=0.079inch, Number of Terminations=2, Packaging="Cut Tape", Width=0.049inch
R14 R17: library part CMP-2000-00925-1, "NOT PANASONIC, THIS IS A 1M RESISTORhttps://www.yageo.com/upload/media/product/productsearch/datasheet/rchip/PYu-RT_1-to-0.01_RoHS_L_13.pdf", Manufacturer=Panasonic, Part Number=ERA-3AEB163V
R24 R25: library part CMP-2000-03183-1, Manufacturer="Vishay Dale", Part Number=CRCW06032K70JNEA
SW1: library part CMP-10040-000029-1, "SWITCH TACTILE SPST-NO 0.02A 15V", Current Rating=5A, Flammability Rating="UL94 V-0", Insulation Color=Black, Max Operating Temperature=85°C, Min Operating Temperature=-40°C, Operating Force=240gf, Actuator Type=Standard, Connector Type=USB, Contact Plating=Gold, Gender=Receptacle, Illumination Type=Non-Illuminated, Mechanical Life=500000Cycles, Mount="Surface Mount", Number Of Contacts=24, Number of Ports=1, Packaging="Tape and Reel", Switch Function=Off-Mom, Switch Travel=0.13mm, Termination=Solder, Throw Configuration=SPST
U1: library part CMP-016-00010-6, "Rudimentary symbol and footprint for the SAM E51 microcontroller"
U2: library part CMP-06279-000031-1, "IC TRANSCEIVER 1/1 8SOIC", Case/Package=SOIC, Max Operating Temperature=125°C, Min Operating Temperature=-40°C, Data Rate=8Mbps, Mount="Surface Mount", Packaging=Rail/Tube, Receiver Hysteresis=200mV, RoHS Compliant=Yes, Series=-
U3 U4: library part CMP-04896-000098-1, "40V, RAIL-TO-RAIL INPUT, PUSH-PU"
Y1: library part CMP-27762-011708-1, "Crystal 48MHz ±20ppm 18pF SMD-4 3.2mm x 2.5mm", Case/Package=CSMD, ESR (Equivalent Series Resistance)=35R, Frequency=48MHz, Frequency Stability=50ppm, Frequency Tolerance=20ppm, Load Capacitance=18pF, Max Operating Temperature=70°C, Min Operating Temperature=-20°C, Operating Frequency="48 MHz", Package Quantity=1000, Resistor Type=Ceramic, Depth=2.5mm, Height=0.031inch, Lead Free="Lead Free", Length=3.2mm, Mount="Surface Mount", Number of Pins=4, Packaging="Tape and Reel", Radiation Hardening=No, REACH SVHC="No SVHC", RoHS Compliant=Yes, Series=ABM8, Series Resistance=35R, Termination=SMD/SMT, Tolerance=20ppm, Width=0.098inch
Y2: library part CMP-40224-000006-1, "CRYSTAL 32.7680KHZ 12.5PF SMD", Frequency=32.768kHz, Load Capacitance=12.5pF, Manufacturer="ECS International", Package=ECX-1210, Temperature="-40°C to +85°C", Temperature Range High=+85°C, Temperature Range Low=-40°C, Tolerance=20ppm, Automotive=No, Category=Crys, ComponentLink2Description=Datasheet, ComponentLink2URL=https://ecsxtal.com/store/pdf/ECX-1210.pdf, Device Class L1="Passive Components", Device Class L2="Crystals / Oscillators", Device Class L3=Crystals, Digikey Description="CRYSTAL 32.7680KHZ 12.5PF SMD", Esr=90kΩ, Height=0.5mm, Lead Free=Yes, Manufacturer Part Number=ECS-.327-12.5-1210-TR, Octopart=https://octopart.com/ecs-.327-12.5-1210-tr-ecs+international-81221340, RoHS=TRUE, Series=ECX-1210

## Via types
v1: diameter 0.5, hole 0.3, Top Layer to Bottom Layer, 82 vias
v2: diameter 1.27, hole 0.711, Top Layer to Bottom Layer, 1 vias

## Nets (pads, with @x,y where several pads share a name; then routed paths per layer and width w, separated by ;. In a path a pad name is that pad's centre, name@x,y a point inside that pad or via, vN(x,y) a via of type N, cw(c..) or ccw(c..) an arc to the next point about the centre after c; other vN are vias at no path point)
3V3: C1.1 C5.1 C7.1 C8.1 D1.3 D2.2 D2.3 L1.1 P3.5 Q4.5-6-7-8 R1.2 R6.1 R19.2 U1.21 U1.34 U1.48 U1.56 | length 25.5
  Top Layer w0.3: C7.1 -10.438,9.212 -9.387,9.212 v1(-9.375,9.2) -5.225,9.2 v1(-5.1,9.325) ; v1(-10.125,18.35) -10.087,18.312 -10.087,17.912 -9.225,17.05 R6.1 ; D1.3 14.5,18.75 14.875,18.75 17.05,16.575 17.05,16.05 17.15,15.95 v1(17.3,15.95) D2.2
  Bottom Layer w0.3: C5.1@-12.216,16.134 -11.75,16.6 -11.107,16.6 -10.707,16.2 -10.163,16.2 -10.163,18.312 v1(-10.125,18.35) ; U1.34 -10.075,9.2 v1(-9.375,9.2) ; C1.1 -7.35,19.475 -6.575,19.475 ; U1.56 -6.05,18.175 -6.575,18.7 -6.575,19.475 ; v1(-6.039,19.725) -6.077,19.687 -6.363,19.687 -6.575,19.475 ; v1(-5.1,9.325) -5.094,9.325 -4.05,8.281 U1.21 -4.05,7.419 -3.925,7.294 C8.1
  other v1: -8.875,-0.95 -7.4,-0.95 -8.157,0.038 -8.857,0.95 -7.4,0.95 -3.675,5.6 1.875,19.5
3V3_POST_SHUNT: Q3.5-6-7-8 R15.2 U4.3
  other v1: -12.625,-1.375
3V3_PRE_SHUNT: J1.07 J1.08 J1.09 J1.10 J3.07 J3.08 J3.09 J3.10 R15.1 R16.2 | length 5.2
  Bottom Layer w0.3: v1(-18.644,0.609) -17.869,0.609 -16.9,-0.36 -16.9,-1.4 -15.525,-2.775 R16.2
  other v1: -21.365,0.635 -18.644,1.879 -21.365,1.905
3V3_SENSE: R19.1 R23.2 U1.18 | length 2.2
  Top Layer w0.3: R19.1 v1(-2.475,6.9)
  Bottom Layer w0.3: U1.18 -2.55,7.029 -2.475,6.954 v1(-2.475,6.9)
5V: C12.2 D1.2 Q2.5-6-7-8 R18.2 U2.3 | length 47.3
  Top Layer w0.3: v1(-11.35,16.05) -11.335,16.035 U2.3 -11.177,16.03 -9.41,16.03 -9.405,16.025 -8.175,16.025 -6.025,18.175 -6.025,18.6 -4.7,19.925 -0.95,19.925 0.325,21.2 0.325,22.774 0.501,22.95 6.4,22.95 8.998,20.352 8.998,19.946 9.146,19.798 13.102,19.798 13.6,19.3 13.6,18.4 13.95,18.05 14.3,18.05 D1.2 ; R18.2@-6.081,5.606 R18.2
  Top Layer w0.5: v1(-8.157,5.112) -7.97,5.112 -7.476,5.606 R18.2@-6.081,5.606
  PWR w0.5: v1(-11.35,16.05) -11.197,16.05 -8.157,13.01 v1(-8.157,5.112)
5V_POST_SHUNT: Q1.5-6-7-8 R11.2 U3.3
  other v1: -12.6,4.525
5V_PRE_SHUNT: J1.03 J1.04 J1.05 J1.06 J3.03 J3.04 J3.05 J3.06 R11.1 R12.2 | length 4.1
  Bottom Layer w0.3: v1(-18.644,3.175) -18.606,3.137 -14.562,3.137 R12.2
  other v1: -21.365,3.175 -18.644,4.419 -21.365,4.445
5V_SENSE: R18.1 R22.2 U1.17 | length 6.3
  Top Layer w0.3: R18.1 -4.825,6.9 -4.6,7.125 -4.6,7.425 -4.2,7.825 v1(-1.2,7.825)
  Bottom Layer w0.3: U1.17 -2.05,7.838 -1.213,7.838 v1(-1.2,7.825)
CAN0_R_N: J1.20 J3.20 R2.1 U2.6 | length 38.8
  Top Layer w0.3: R2.1 -19.15,-8.011 -18.9,-7.761 -18.9,-5.935 -18.68,-5.715 J3.20
  Bottom Layer w0.3: J1.20 -18.68,-5.715 -18.9,-5.935 -18.9,-7.761 -19.544,-8.405 -19.623,-8.405 -19.799,-8.581 -19.799,-8.996 -20.21,-9.407 -20.871,-9.407 -22.312,-7.965 -22.312,-7.415 -23.277,-6.45 -23.277,7.023 -15.925,14.375 -15.925,15.169 -15.825,15.269 v1(-15.825,16.041)
  other v1: -18.689,-5.741
CAN0_R_P: J1.19 J3.19 R2.2 U2.7 | length 36.3
  Top Layer w0.3: J3.19 -21.32,-5.715 -21.1,-5.935 -21.1,-7.761 -20.85,-8.011 R2.2
  Bottom Layer w0.3: J1.19 -21.32,-5.715 -21.1,-5.935 -21.1,-7.761 -20.456,-8.405 -20.377,-8.405 -20.201,-8.581 -20.201,-8.829 -20.377,-9.005 -20.704,-9.005 -21.91,-7.799 -21.91,-7.249 -22.875,-6.284 -22.875,6.857 -15.524,14.208 -15.524,14.486 -15.314,14.696 v1(-15.314,14.75)
  other v1: -21.374,-5.741
CAN0_RX: R7.1 R9.2 U1.44 | length 8.4
  Top Layer w0.3: R9.2 R7.1 -17.55,14.625 -17.35,14.425 -17.35,14.376 -17.174,14.2 v1(-12.2,14.2)
  Bottom Layer w0.3: v1(-12.2,14.2) U1.44
CAN0_TX: U1.43 U2.1 | length 1.2
  Bottom Layer w0.3: v1(-11.525,13.5) -11.471,13.5 -11.271,13.7 U1.43
CUTOFF_MOSFET: D5.2 D6.2 Q1.4 Q2.4 Q3.4 Q4.4 R13.2 | length 27.2
  Top Layer w0.3: Q3.4 -11.325,0.975 -11.3,1 -11.3,1.081 -9.162,3.218 -8.968,3.218 ; Q1.4 -11.325,6.05 -11.3,6.075 -11.3,6.156 -10.979,6.477 -9.571,6.477 -9.423,6.329 -9.423,4.471 Q2.4@-9.769,4.125 ; Q4.4 -9.9,-0.95 -9.769,-0.95 -9.407,-0.587 -9.407,1.329 -8.879,1.857 -7.517,3.218 ; Q2.4@-9.85,4.1 -8.968,3.218 ; v1(-6.125,4.425) -6.35,4.2 -6.35,4.069 -7.201,3.218 -7.517,3.218 ; -8.968,3.218 -7.517,3.218
  Bottom Layer w0.3: D5.2 -7.111,4.144 ; D6.2 -10.45,0.875 -10.375,0.95 -10.305,0.95 -7.111,4.144 ; -6.46,4.144 -7.111,4.144 ; -6.45,4.134 -6.159,4.425 v1(-6.125,4.425)
G_LED: R3.2 U1.46 | length 23.8
  Top Layer w0.3: v1(-3.15,15.95) -3.096,15.95 -2.847,16.198 3.49,16.198 3.523,16.232 3.665,16.232 v1(3.703,16.27)
  Bottom Layer w0.3: U1.46 -8.875,15.2 -8.45,15.625 -4.5,15.625 -4.15,15.975 -3.175,15.975 v1(-3.15,15.95) ; v1(3.703,16.27) 12.805,16.27 R3.2
GND: C1.2 C2.1 C3.2 C4.2 C5.2 C6.2 C7.2 C8.2 C9.2 C10.2 C11.2 C12.1 C13.2 C14.2 C15.2 C16.2 D7.1 J1.11 J1.12 J1.13 J1.14 J1.15 J1.16 J1.17 J1.18 J2.09 J2.10 J2.11 J2.12 J2.13 J2.14 J2.15 J2.16 J2.17 J2.18 J2.19 J2.20 J3.11 J3.12 J3.13 J3.14 J3.15 J3.16 J3.17 J3.18 J4.09 J4.10 J4.11 J4.12 J4.13 J4.14 J4.15 J4.16 J4.17 J4.18 J4.19 J4.20 P3.6 P3.S1 P3.S2 R8.2 R9.1 R10.2 R13.1 R22.1 R23.1 R24.1 R25.1 SW1.2 U1.7 U1.22 U1.33 U1.47 U1.54 U1.65 U2.2 U2.8 U3.2 U4.2 | length 0.7
  Top Layer w0.3: SW1.2 10.05,17.075 10.175,17.2 10.175,17.7
  other v1: 18.626,-5.741 21.356,-5.741 18.626,-4.471 21.356,-4.471 -21.365,-4.445 -18.635,-4.445 -18.644,-3.201 18.626,-3.201 21.356,-3.201 -21.365,-3.175 -18.644,-1.931 18.626,-1.931 21.356,-1.931 -21.365,-1.905 -18.644,-0.661 18.626,-0.661 21.356,-0.661 -21.365,-0.635 21.405,0.596 18.626,0.609 -8.311,19.6
  other v2: -5.8,12.45
NetC2_2: C2.2 C3.1 L2.2 U1.53 | length 8.7
  Top Layer w0.3: C2.2 -7.582,19.75 -7.446,19.886 -7.446,20.104 -7.124,20.426 -6.549,20.426 -5.575,21.399 -5.575,21.6 -4.925,22.25 L2.2 ; C2.2@-7.589,19.736 -7.589,18.439 v1(-7.575,18.425)
  Bottom Layer w0.3: v1(-7.575,18.425) -7.55,18.4 U1.53
NetC9_1: C9.1 Y1.2
  other v1: -14.8,9.825
NetC10_1: C10.1 Y1.4
  other v1: -12.5,11.575
NetC15_1: C15.1 R12.1 R14.2 U3.4 | length 8.2
  Bottom Layer w0.3: C15.1 -15.798,4.352 -14.237,4.352 U3.4 U3.4@-13.959,4.354 ; R14.2 -15.025,7.625 -14.297,6.897 -13.722,6.897 -13.3,6.475 -13.3,4.951 -13.897,4.354 U3.4@-13.959,4.354 ; R12.1@-13.225,3.025 -13.45,3.25 -13.45,3.845 U3.4@-13.959,4.354
NetC16_1: C16.1 R16.1 R17.2 U4.4 | length 7.4
  Bottom Layer w0.3: C16.1 -15.798,-1.548 U4.4@-14.237,-1.548 ; R17.2 -14.25,1.4 -14.25,1.151 -14.024,0.925 -13.6,0.925 -13.381,0.706 -13.381,-1.029 -13.897,-1.546 U4.4 ; U4.4@-14.23,-1.555 -14.23,-2.82 R16.1
NetD1_1: D1.1 R8.1 | length 1.4
  Top Layer w0.3: v1(11.55,17.675) 11.604,17.675 11.879,17.95 D1.1
NetD1_4: D1.4 R10.1 | length 1.3
  Top Layer w0.3: v1(11.588,18.998) 11.642,18.998 11.79,18.85 D1.4
NetD2_1: D2.1 R5.1 | length 1.4
  Top Layer w0.3: v1(14.4,14.775) 14.454,14.775 14.729,15.05 D2.1
NetD2_4: D2.4 R3.1 | length 1.4
  Top Layer w0.3: v1(14.425,16.15) 14.479,16.15 14.679,15.95 D2.4
NetD5_1: D5.1 R14.1 U3.1 | length 3.9
  Bottom Layer w0.3: R14.1 -13.725,7.625 -12.586,6.486 -12.586,6.369 -12.472,6.254 U3.1 D5.1
NetD6_1: D6.1 R17.1 U4.1 | length 4.8
  Bottom Layer w0.3: R17.1@-13.225,1.825 -12.95,1.55 -12.95,0.833 -12.472,0.354 U4.1 -12.019,0.239 -11.439,0.239 -10.525,-0.675 -10.525,-1.23 D6.1
NetL2_1: L2.1 U1.55 | length 5.1
  Top Layer w0.3: v1(-6.525,16.2) -6.487,16.238 -6.237,16.238 -4.925,17.55 L2.1
  Bottom Layer w0.3: U1.55 -6.55,16.225 v1(-6.525,16.2)
NetQ1_1: Q1.1 Q1.2 Q1.3 Q2.1 Q2.2 Q2.3
NetQ3_1: Q3.1 Q3.2 Q3.3 Q4.1 Q4.2 Q4.3
NetR4_2: R4.2 SW1.1 | length 22.5
  Top Layer w0.3: R4.2 -9.15,20.7 -8.925,20.925 -8.925,22.175 -7.674,23.426 -7.599,23.45 6.625,23.45 9.4,20.675 9.4,20.45 9.525,20.325 SW1.1
NetR7_2: R7.2 U2.4 | length 7
  Top Layer w0.3: R7.2 -17.55,15.875 -16.75,16.675 -12.475,16.675 -11.845,17.305 U2.4
PYRO_PWR: J2.01 J2.02 J2.03 J2.04 J2.05 J2.06 J2.07 J2.08 J4.01 J4.02 J4.03 J4.04 J4.05 J4.06 J4.07 J4.08 R21.2 | length 3.3
  Top Layer w0.3: J4.01 18.3,5.73 R21.2
  other v1: 18.626,1.879 21.356,1.879 18.626,3.149 21.356,3.149 18.626,4.419 21.356,4.419 18.626,5.689 21.356,5.689
PYRO_PWR_SENSE: D7.3 R21.1 R25.2 U1.4 | length 25.3
  Top Layer w0.3: D7.3 15.9,8.95 v1(15.925,8.975) R21.1
  Bottom Layer w0.3: U1.4 0.089,14.7 0.964,13.825 15.075,13.825 15.925,12.975 v1(15.925,8.975)
R_LED: R5.2 U1.45 | length 24.2
  Top Layer w0.3: v1(-3.775,15.425) -3.75,15.4 -2.875,15.4 -2.587,15.688 0.708,15.688 0.746,15.727 3.515,15.727 3.621,15.62 v1(3.675,15.62)
  Bottom Layer w0.3: U1.45 -8.807,14.7 -8.307,15.2 -4.051,15.2 -3.826,15.425 v1(-3.775,15.425) ; v1(3.675,15.62) 12.055,15.62 12.55,15.125 12.675,15.125 12.9,14.9 R5.2
RESETN: C11.1 P3.4 R4.1 R6.2 U1.52 | length 16.4
  Top Layer w0.3: C11.1 R4.1 -9.188,19.387 -9.188,18.362 v1(-9.175,18.35)
  Bottom Layer w0.3: U1.52 -8.05,17.575 -8.787,18.312 -9.137,18.312 v1(-9.175,18.35) -9.175,19.825 -8.426,20.574 -0.049,20.574 0.625,19.9 P3.4
SWCLK: P3.1 R1.1 U1.57 | length 4.5
  Bottom Layer w0.3: U1.57 -5.55,18.425 -5.275,18.7 R1.1 -3.475,18.75 -3.125,19.1 P3.1
SWDIO: P3.2 U1.58 | length 4.7
  Bottom Layer w0.3: U1.58 -5.05,17.549 -4.471,18.128 -2.847,18.128 -1.875,19.1 P3.2
SWO: P3.3 U1.59 | length 5.4
  Bottom Layer w0.3: U1.59 -4.55,17.481 -4.304,17.727 -1.998,17.727 -0.625,19.1 P3.3
VCC: J1.01 J1.02 J3.01 J3.02 R20.2 U3.6 U4.6 | length 19
  Top Layer w0.3: J3.01 -21.7,5.73 R20.2
  Bottom Layer w0.3: v1(-21.365,5.715) -21.145,5.495 -20.405,5.495 -20.405,5.455 -20.003,5.053 -20.003,2.708 -19.846,2.55 -16.768,2.55 -14.573,0.354 U4.6 ; J1.02 -17.895,5.715 -17.356,6.254 U3.6
  other v1: -18.644,5.689
VCC_SENSE: R20.1 R24.2 U1.9 | length 20.4
  Top Layer w0.3: R20.1 -19.275,9.3 R24.2 -19.25,9.4 -17.95,10.7 -3.775,10.7 v1(-2.45,12.025)
  Bottom Layer w0.3: v1(-2.45,12.025) -2.412,12.063 -2.162,12.063 -2.025,12.2 U1.9
VDD_ANA: C4.1 C6.1 L1.2 U1.8 | length 7.6
  Top Layer w0.3: L1.2 -3.1,14.025 -2.45,13.375 v1(-2.45,12.7) C4.1@-1.2,12.7
  Bottom Layer w0.3: v1(-2.45,12.7) U1.8 C6.1
X_IN: U1.31 Y1.3 | length 8.9
  Bottom Layer w0.3: Y1.3 -14.675,11.575 -13.65,10.55 -13.65,9.25 -11.573,7.173 -9.226,7.173 -9.05,7.349 U1.31
X_OUT: U1.32 Y1.1 | length 4.1
  Bottom Layer w0.3: Y1.1 -12.256,9.581 -12.256,9.026 -11.081,7.85 U1.32
XIN_32: C13.1 U1.1 Y2.1 | length 2.9
  Bottom Layer w0.3: U1.1 -0.02,16.2 0.143,16.363 Y2.1 0.708,16.363 1.325,16.98 v1@1.325,17.031
  other v1: 1.325,17.125
XOUT_32: C14.1 U1.2 Y2.2 | length 2.9
  Bottom Layer w0.3: U1.2 -0.02,15.7 0.143,15.538 Y2.2 0.708,15.538 1.325,14.92 v1@1.325,14.881
  other v1: 1.325,14.8
pads on no net: D3.1 D3.2 D3.3 D3.4 D4.1 D4.2 D4.3 D4.4 D7.2 J1. J2. J3. J4. P1.1 P1.2 P1.3 P1.4 P1.MP1 P1.MP2 P2.1 P2.2 P2.3 P2.4 P2.MP1 P2.MP2 U1.3 U1.5 U1.6 U1.10 U1.11 U1.12 U1.13 U1.14 U1.15 U1.16 U1.19 U1.20 U1.23 U1.24 U1.25 U1.26 U1.27 U1.28 U1.29 U1.30 U1.35 U1.36 U1.37 U1.38 U1.39 U1.40 U1.41 U1.42 U1.49 U1.50 U1.51 U1.60 U1.61 U1.62 U1.63 U1.64 U2.5 U3.5 U4.5

## Polygon pours and split planes (outlines as drawn)
GND on Top Layer "GND_L01_P012" (solid, pour order 12): -15.888,-19.298 ccw(c-13.96,-17) -13.96,-20 13.96,-20 ccw(c13.96,-17) 15.888,-19.298 15.868,-19.318 ccw(c0,0)
5V_PRE_SHUNT on Top Layer "5V_PRE_SHUNT_L01_P006" (solid, pour order 6): -23.175,4.815 -23.175,2.805 -16.18,2.805 -16.175,2.8 -15.025,2.8 -15.025,3.95 -16.825,4.815
3V3_PRE_SHUNT on Top Layer "3V3_PRE_SHUNT_L01_P002" (solid, pour order 2): -23.175,2.275 -16.825,2.275 -15.025,2.275 -15.025,1.125 -16.825,0.265 -23.175,0.265
5V_POST_SHUNT on Top Layer "5V_POST_SHUNT_L01_P008" (solid, pour order 8): -16.175,6.3 -14.15,6.3 -12.17,6.3 -12.17,3.85 -14.15,3.85 -14.45,3.9 -16.175,5.15
3V3_POST_SHUNT on Top Layer "3V3_POST_SHUNT_L01_P007" (solid, pour order 7): -16.175,-0.075 -14.45,1.175 -14.15,1.225 -12.17,1.225 -12.17,-1.225 -16.175,-1.225
NetQ3_1 on Top Layer "NETQ3_1_L01_P001" (solid, pour order 1): -11.65,0.5 -11.15,0.5 -10.175,1.15 -9.675,1.15 -9.675,-0.5 -10.175,-0.5 -11.15,-1.15 -11.65,-1.15
NetQ1_1 on Top Layer "NETQ1_1_L01_P000" (solid, pour order 0): -11.65,5.575 -11.15,5.575 -10.175,6.225 -9.675,6.225 -9.675,4.575 -10.175,4.575 -11.15,3.925 -11.65,3.925
3V3 on PWR "3V3_L02_P019" (solid, pour order 19): -15.888,-19.298 ccw(c-13.96,-17) -13.96,-20 13.96,-20 ccw(c13.96,-17) 15.888,-19.298 15.868,-19.318 ccw(c0,0)
5V_PRE_SHUNT on PWR "5V_PRE_SHUNT_L02_P018" (solid, pour order 18): -17.525,4.825 -22.475,4.825 -22.475,2.8 -17.525,2.8
3V3_PRE_SHUNT on PWR "3V3_PRE_SHUNT_L02_P014" (solid, pour order 14): -17.525,2.285 -22.475,2.285 -22.475,0.26 -17.525,0.26
VCC on PWR "VCC_L02_P017" (solid, pour order 17): -17.525,5.35 -22.475,5.35 -22.475,6.075 -17.525,6.075
PYRO_PWR on PWR "PYRO_PWR_L02_P016" (solid, pour order 16): 16.825,6.075 23.175,6.075 23.175,1.55 16.825,1.55
GND on GND "GND_L03_P009" (solid, pour order 9): -15.888,-19.298 ccw(c-13.96,-17) -13.96,-20 13.96,-20 ccw(c13.96,-17) 15.888,-19.298 15.868,-19.318 ccw(c0,0)
GND on Bottom Layer "GND_L04_P013" (solid, pour order 13): -15.888,-19.298 ccw(c-13.96,-17) -13.96,-20 13.96,-20 ccw(c13.96,-17) 15.888,-19.298 15.868,-19.318 ccw(c0,0)

## Silkscreen, mask and mechanical layers (free items; w line width, h text height)
Top Overlay:
  region: 980 vertices and 2 holes, not listed, extent 14.33,-15.265 19.53,-8.999
  text "RST" at 9.05,20.95 h0.75
  text "PWR" at 11.65,19.45 h0.75
  text "CAN" at -14.525,18.4 h0.75
  text "MCU" at 15.15,16.55 h0.75
  text "STAT1" at 16.575,13.55 h0.75
  text "STAT2" at 18.125,10.55 h0.75
  text "OC PROT" at -13.275,2.2 h0.75
  text "HYDRA_V3_TEMPLATE" at 0.15,-11.725 h0.75
  text "Designed with contempt" at 0.1,-12.733 h0.5
Bottom Overlay:
  text "DBG" at -7,21.5 h0.75
  text "DBG" at 9.425,21.5 h0.75
  text "MCU" at 0.675,17.35 h0.75
  text "OC PROT / LOGIC" at -1.739,1.425 h0.75
  text "RFD900" at -3.85,-18.575 h0.75
  text "SBG" at 7,-18.625 h0.75
Mechanical 1:
  lines w0.254: -15.888,-19.298 ccw(c-13.96,-17) -13.96,-20 13.96,-20 ccw(c13.96,-17) 15.888,-19.298 ; -15.868,-19.318 cw(c0,0) 15.868,-19.318